# Altium PCB MB1520.PcbDoc (part 1 of 7)
Units mm, origin at the board's own origin, x right, y up, seen from the top; angles counter-clockwise.
Board outline 159 x 88 mm, 6 copper layers (Top Layer, Signal Layer 1, Signal Layer 2, Signal Layer 3, Signal Layer 4, Bottom Layer), stack 1.572 mm thick; 473 components, 377 nets, 1832 pads, 1378 vias.
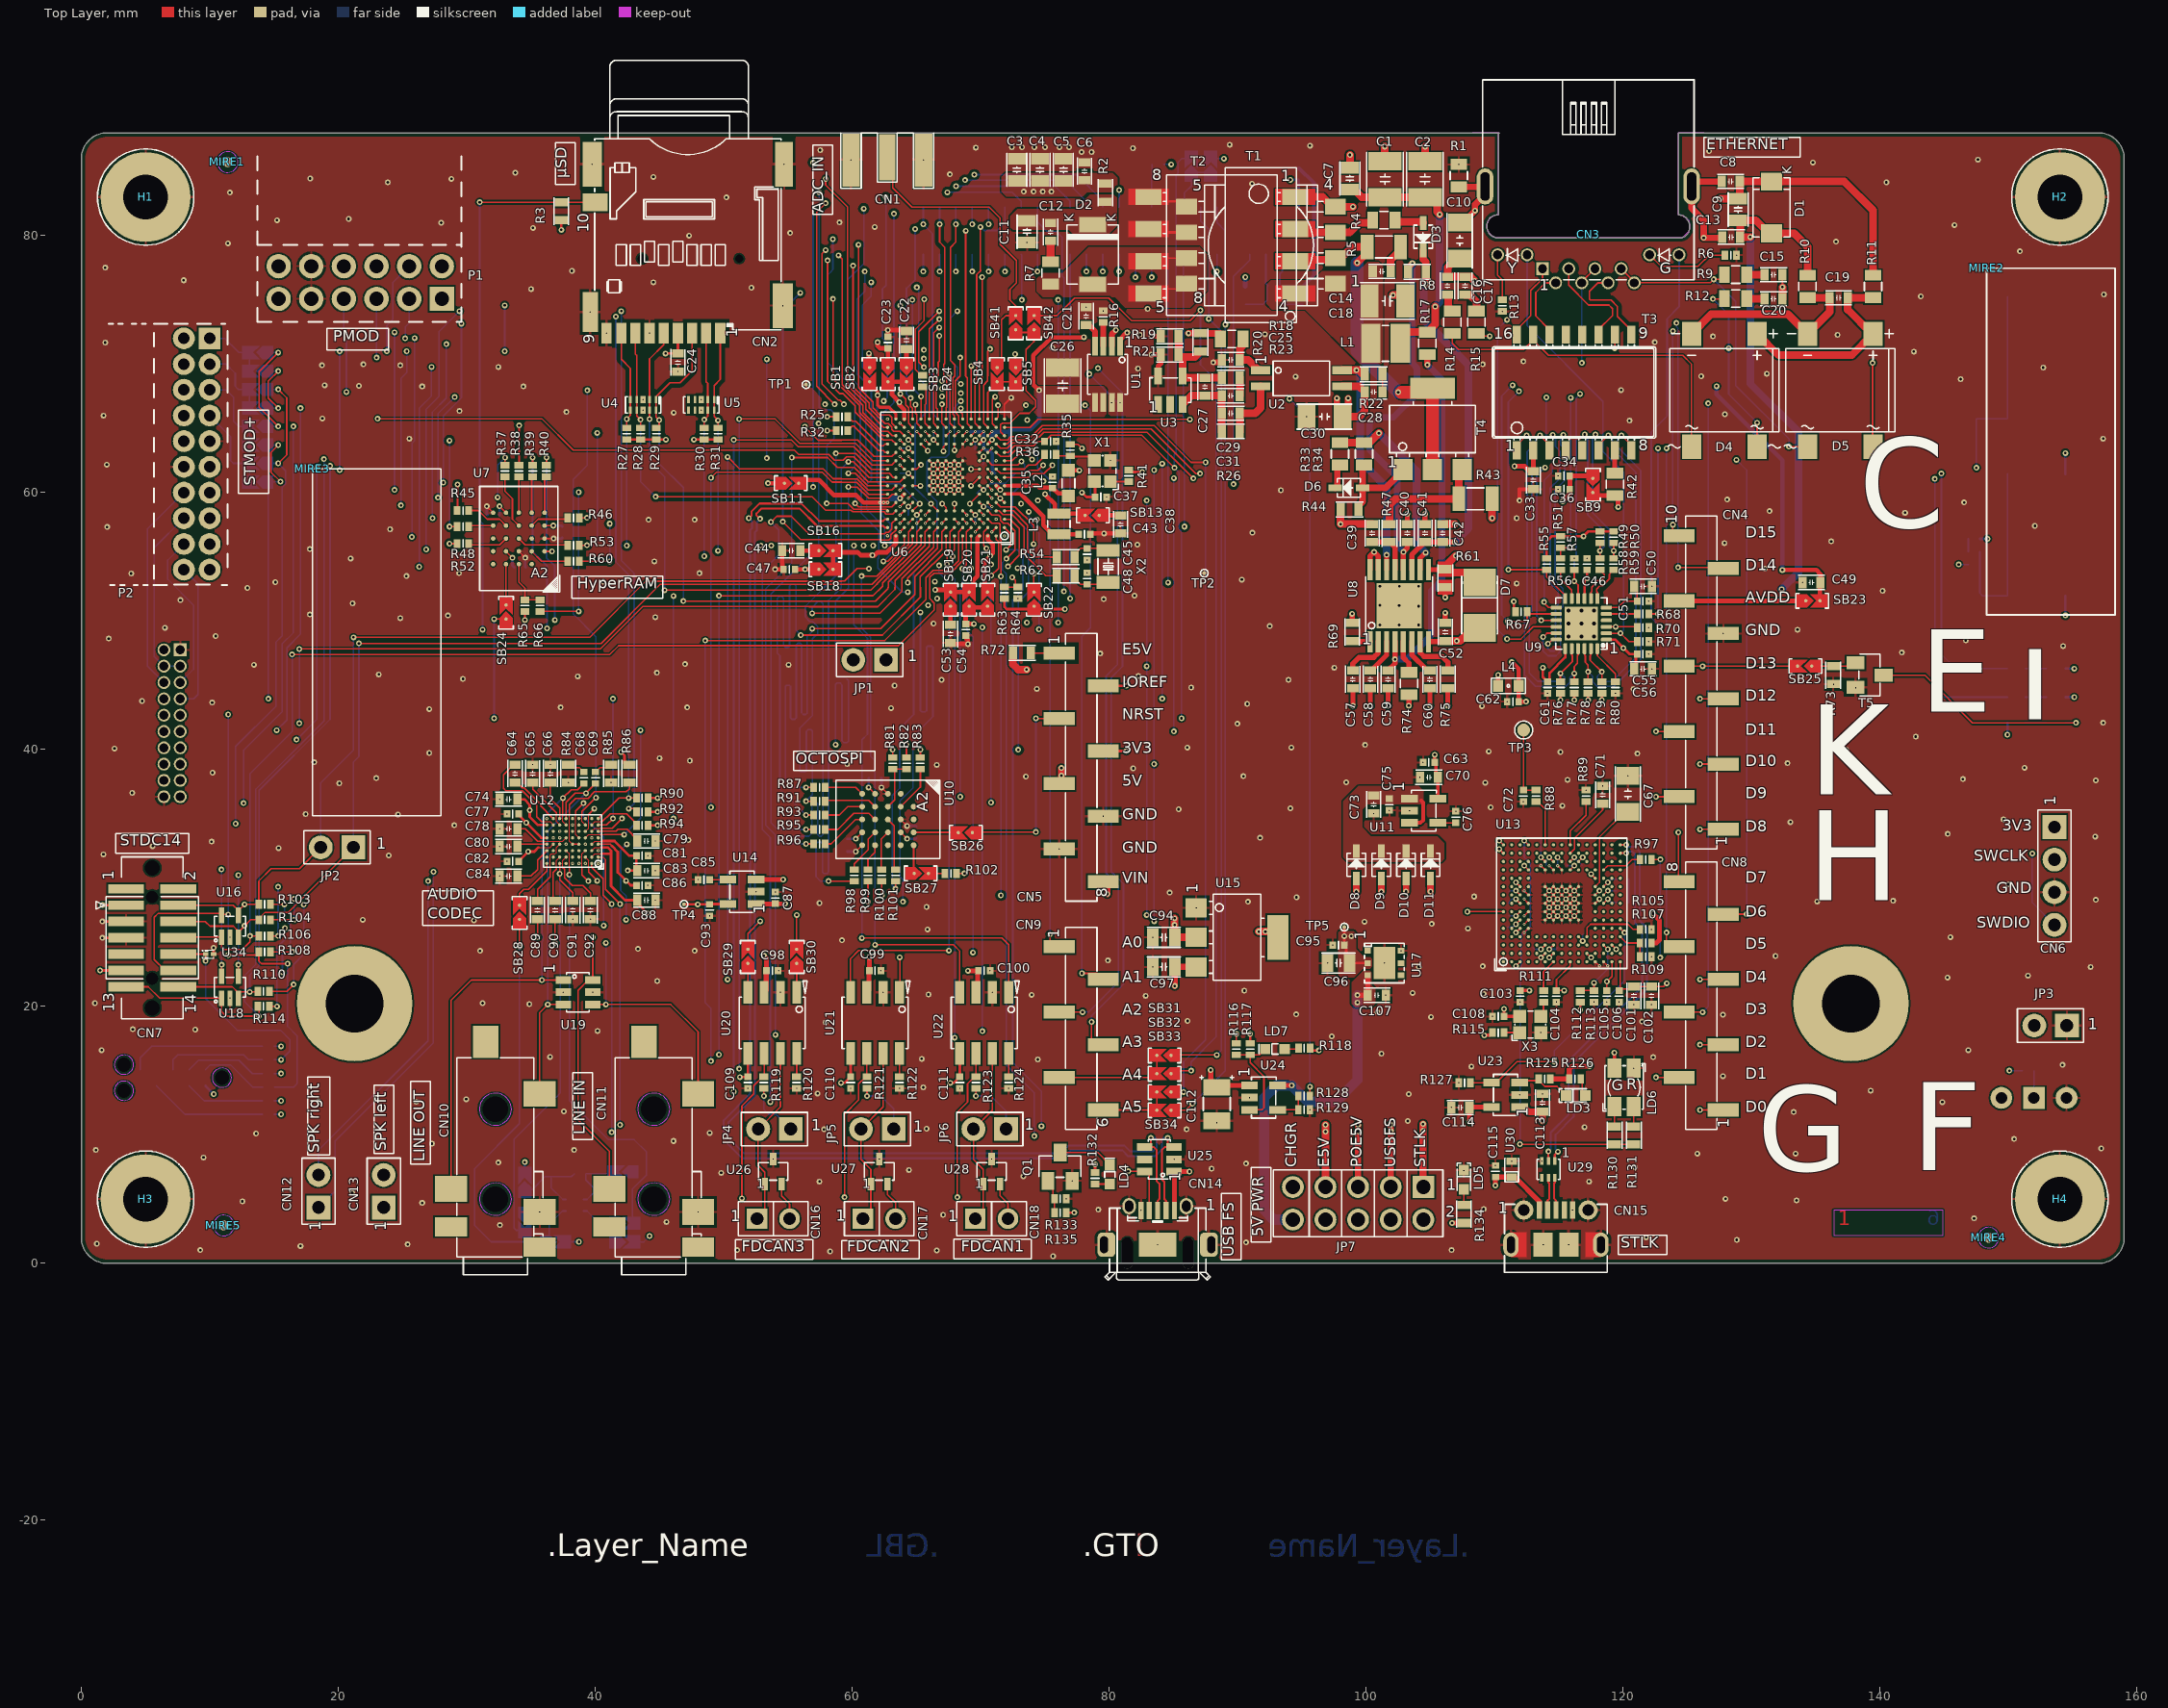
[diagram p0: Top Layer view]
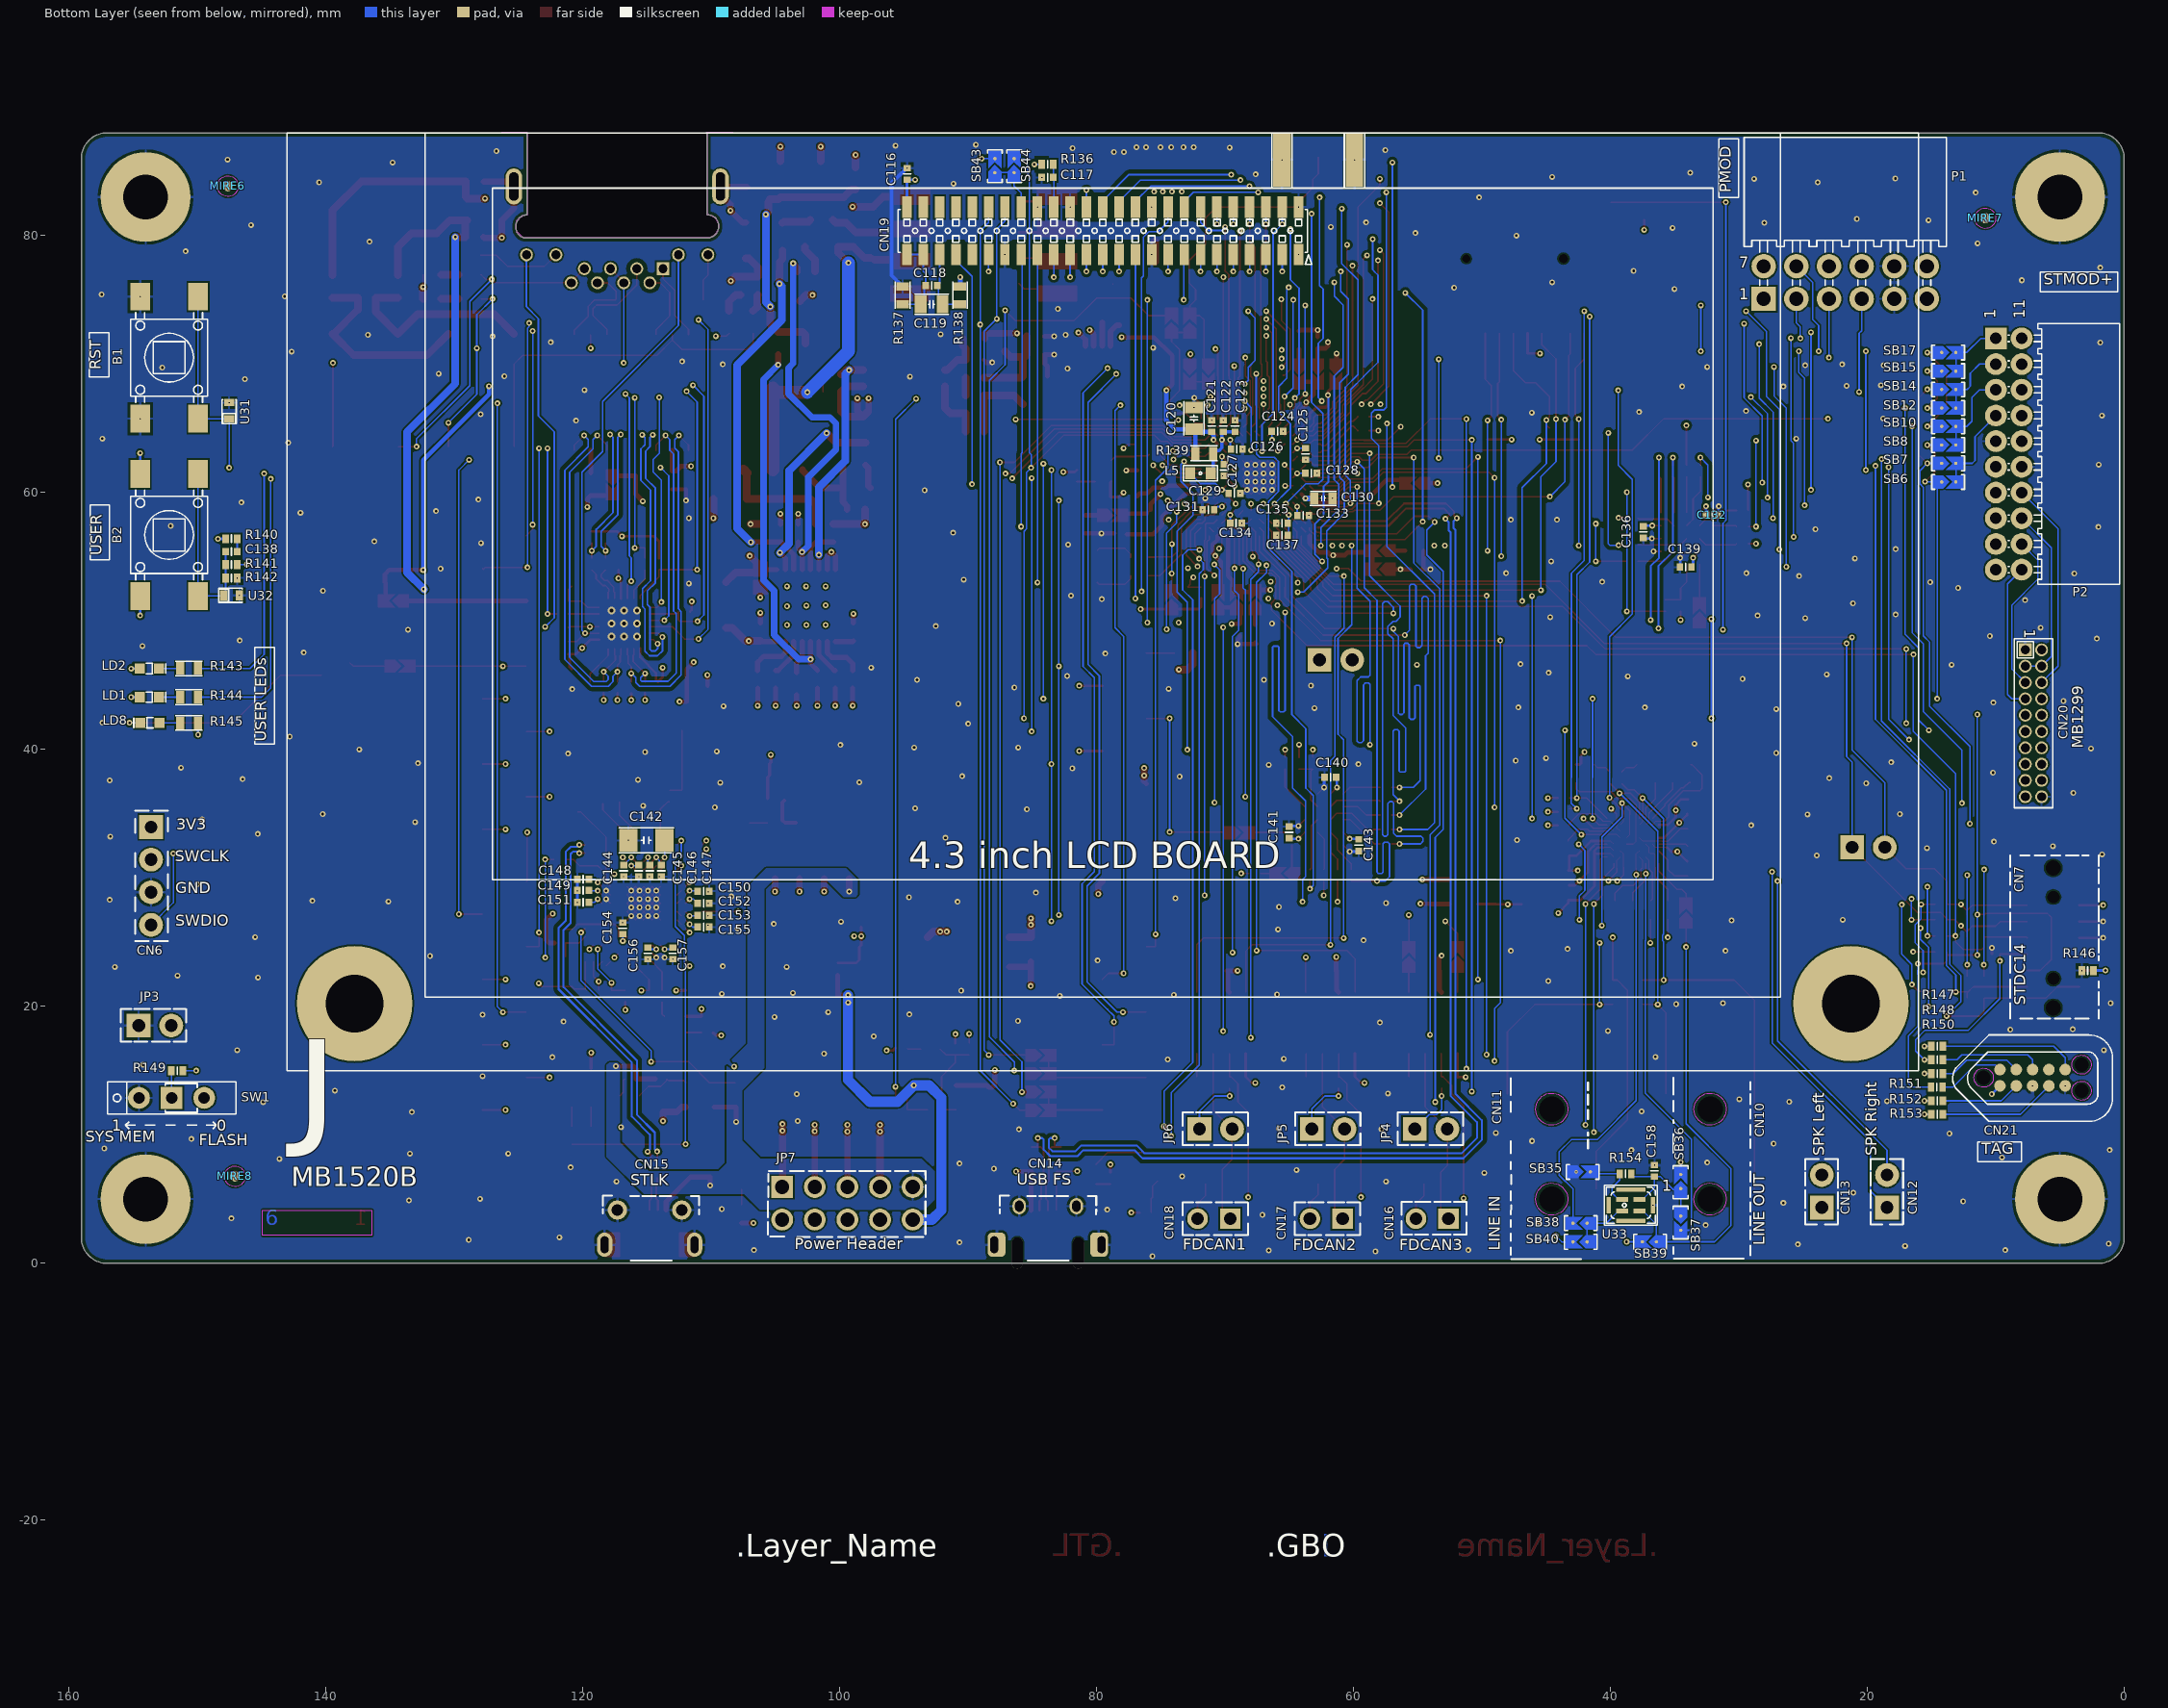
[diagram p1: Bottom Layer view, seen from below]
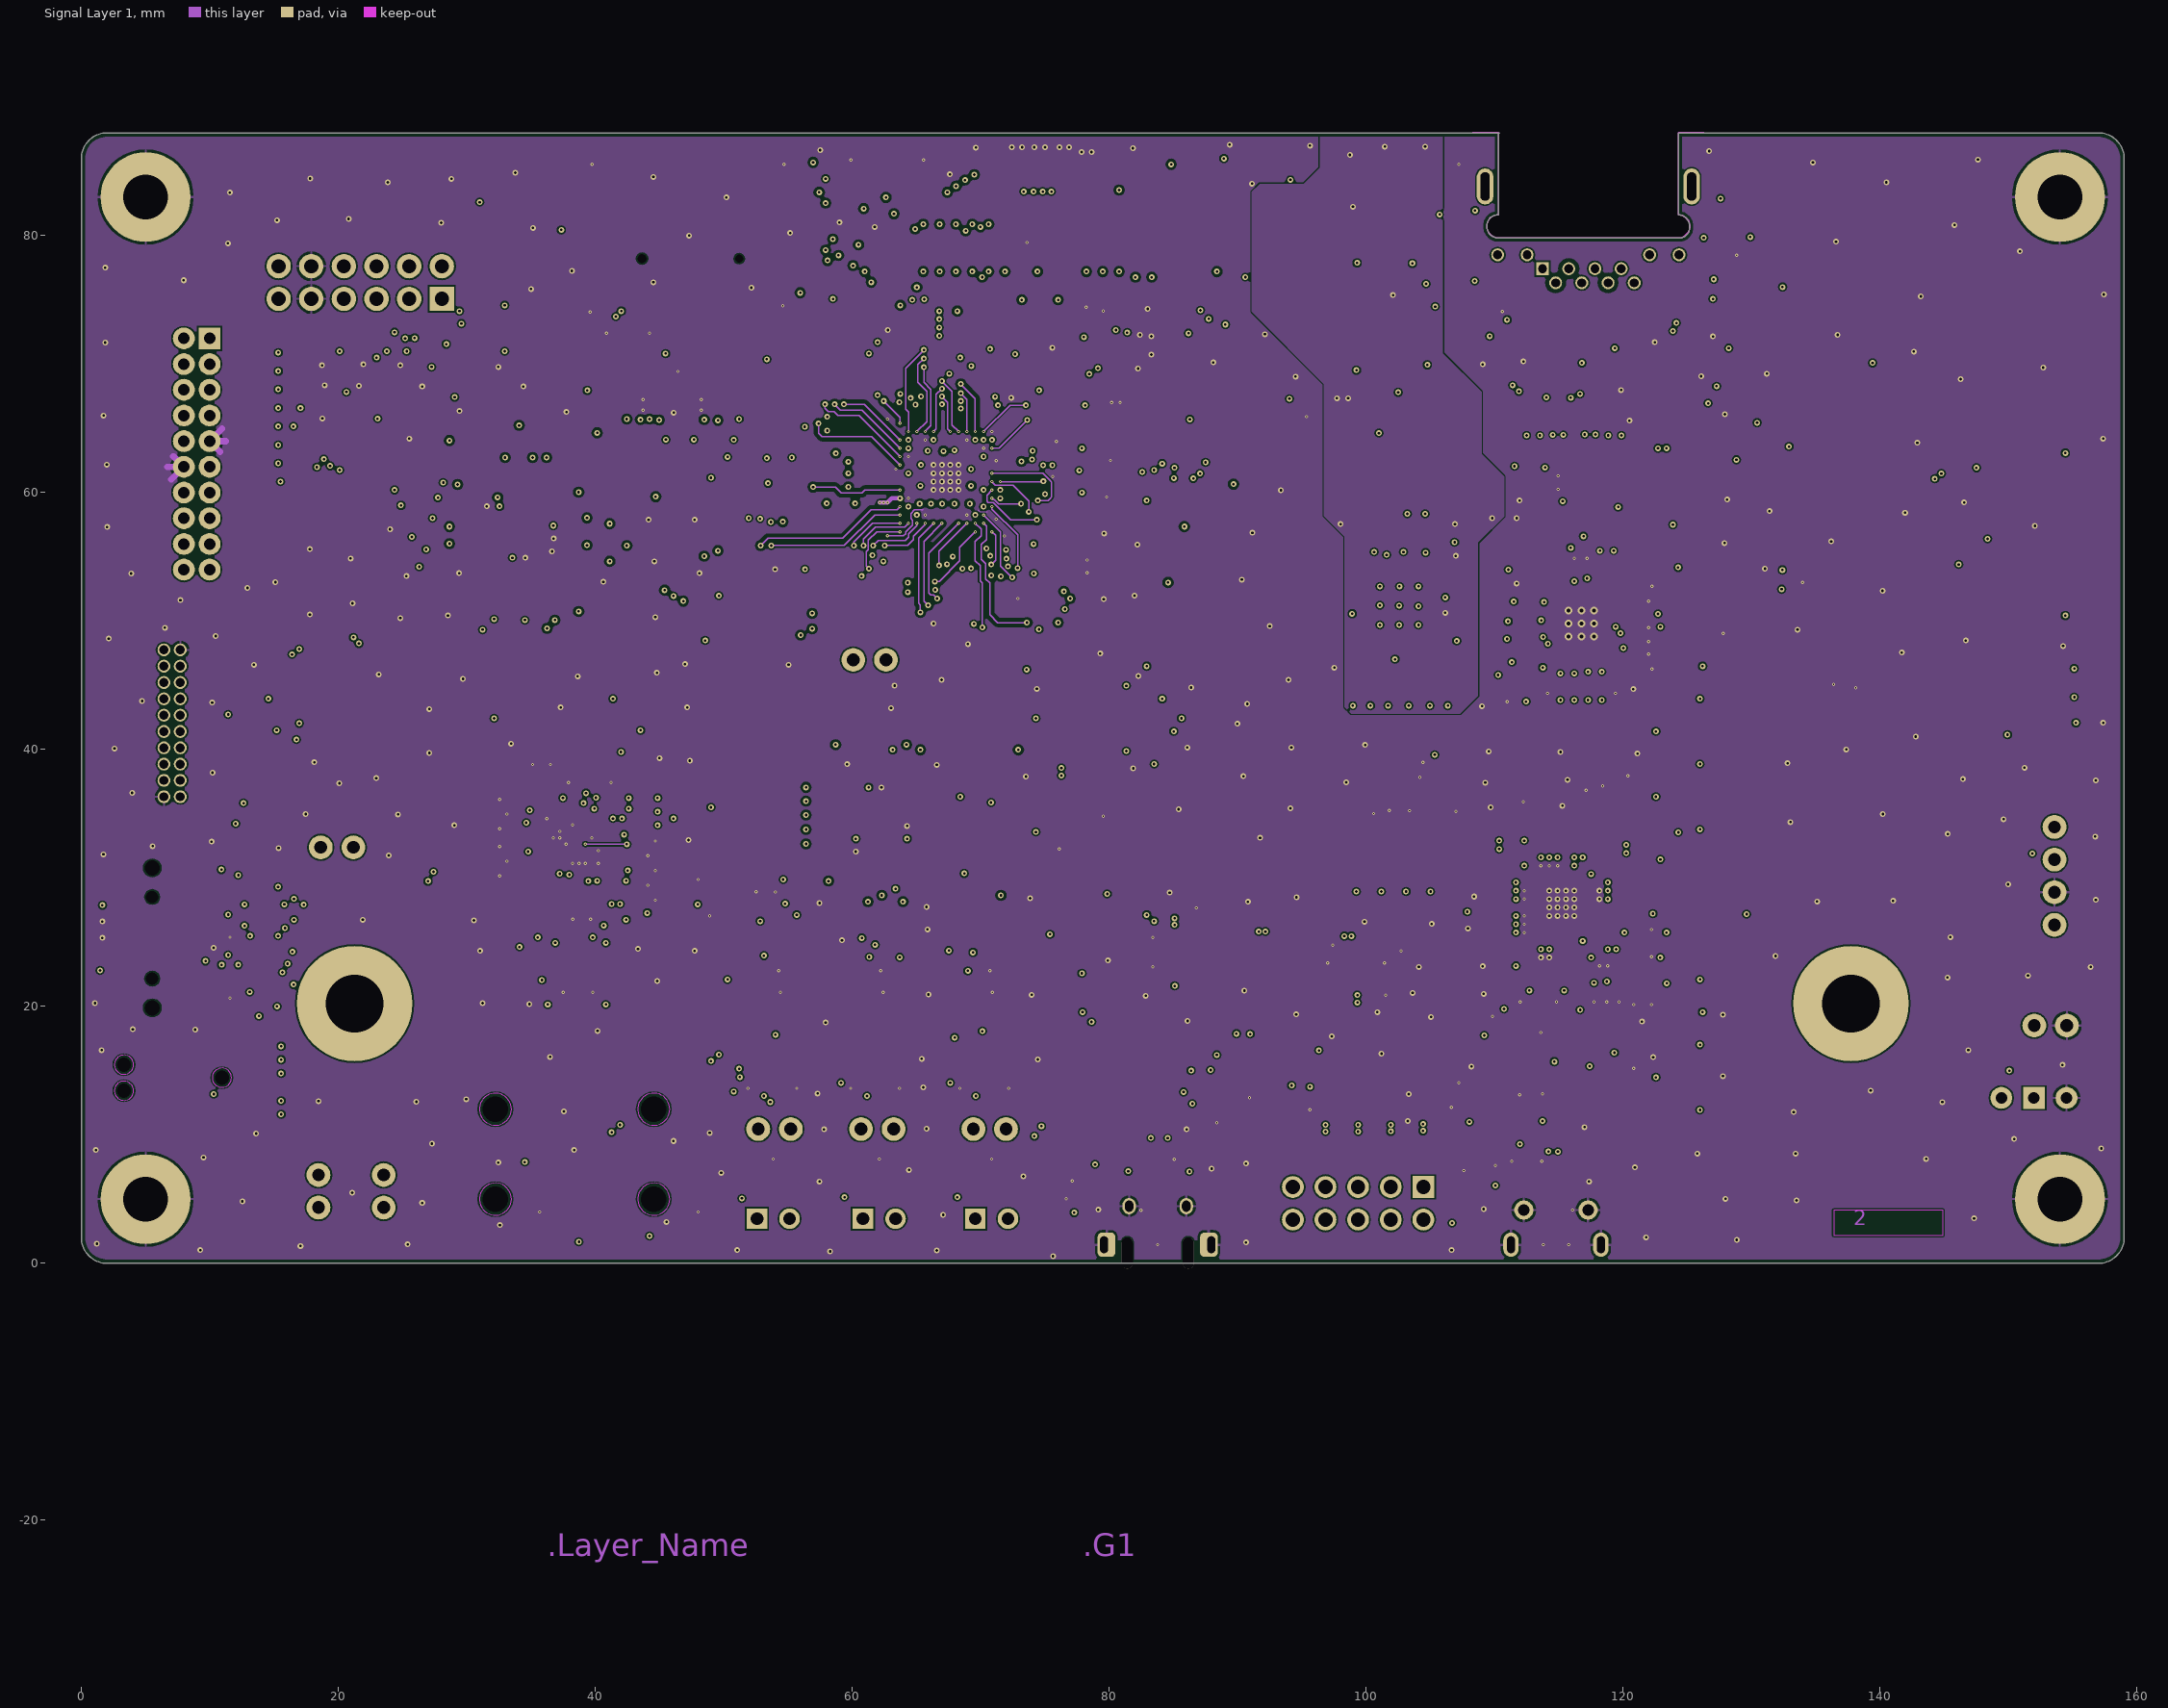
[diagram p2: Signal Layer 1]
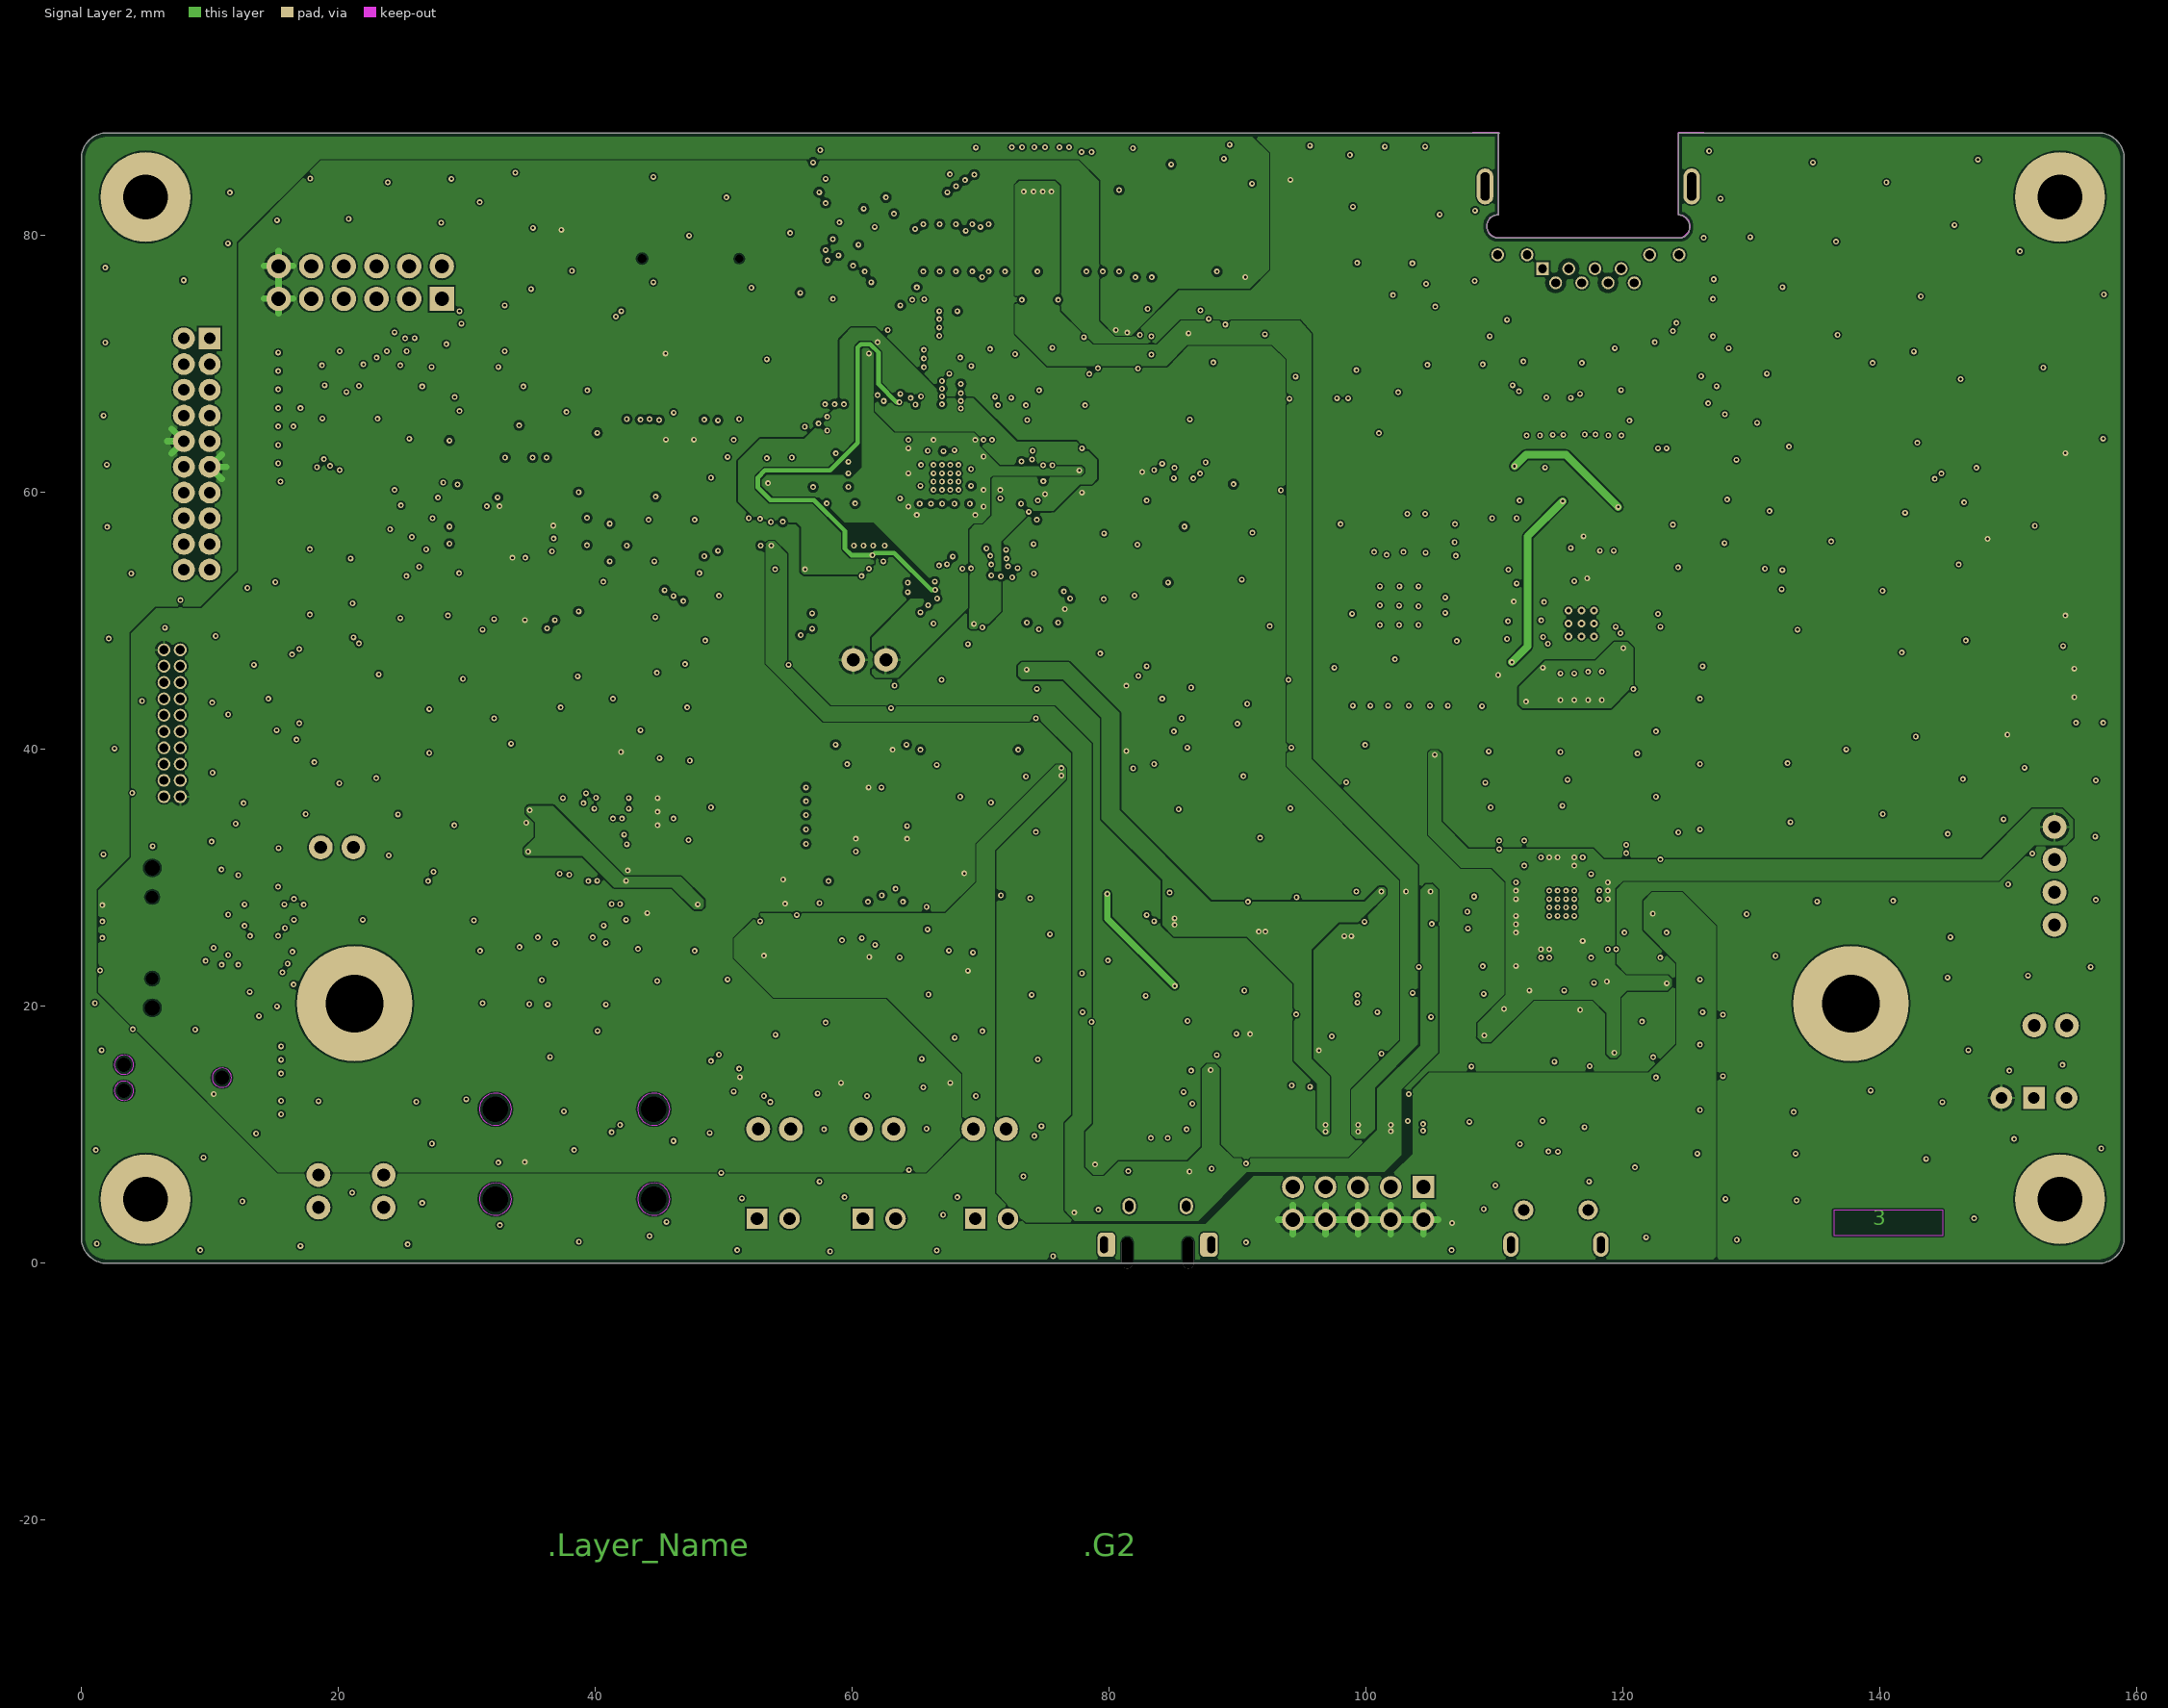
[diagram p3: Signal Layer 2]
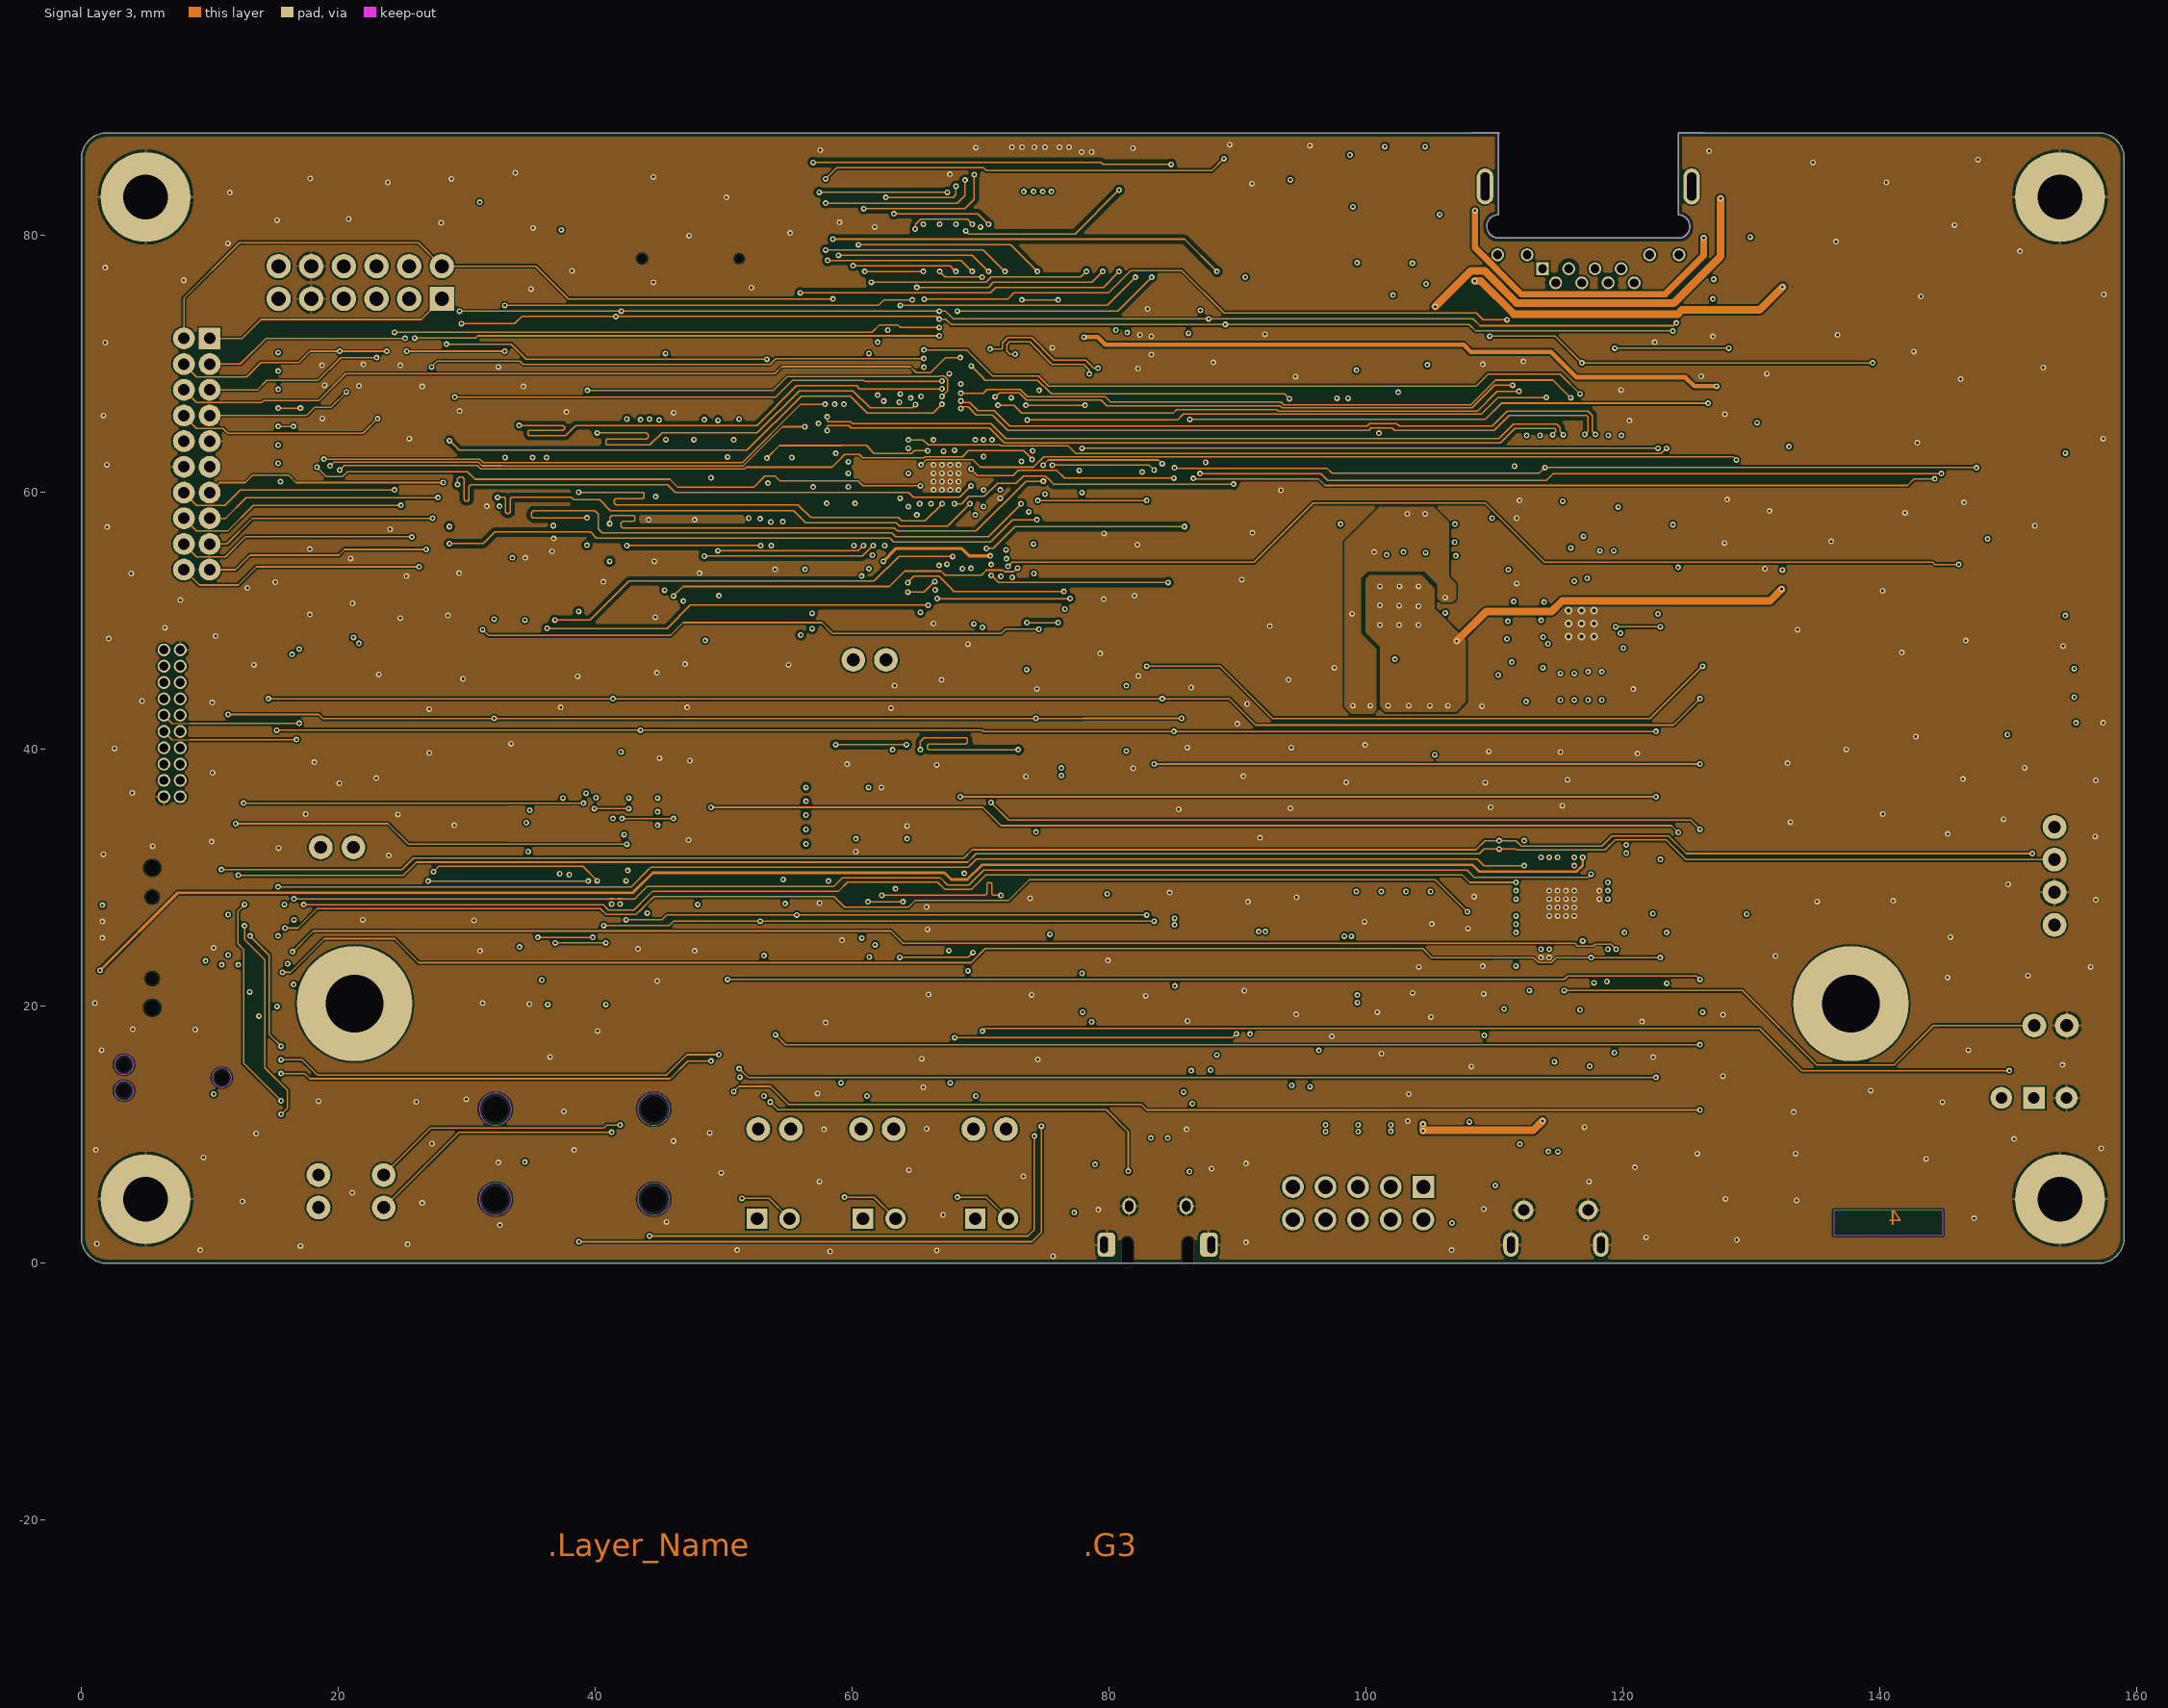
[diagram p4: Signal Layer 3]
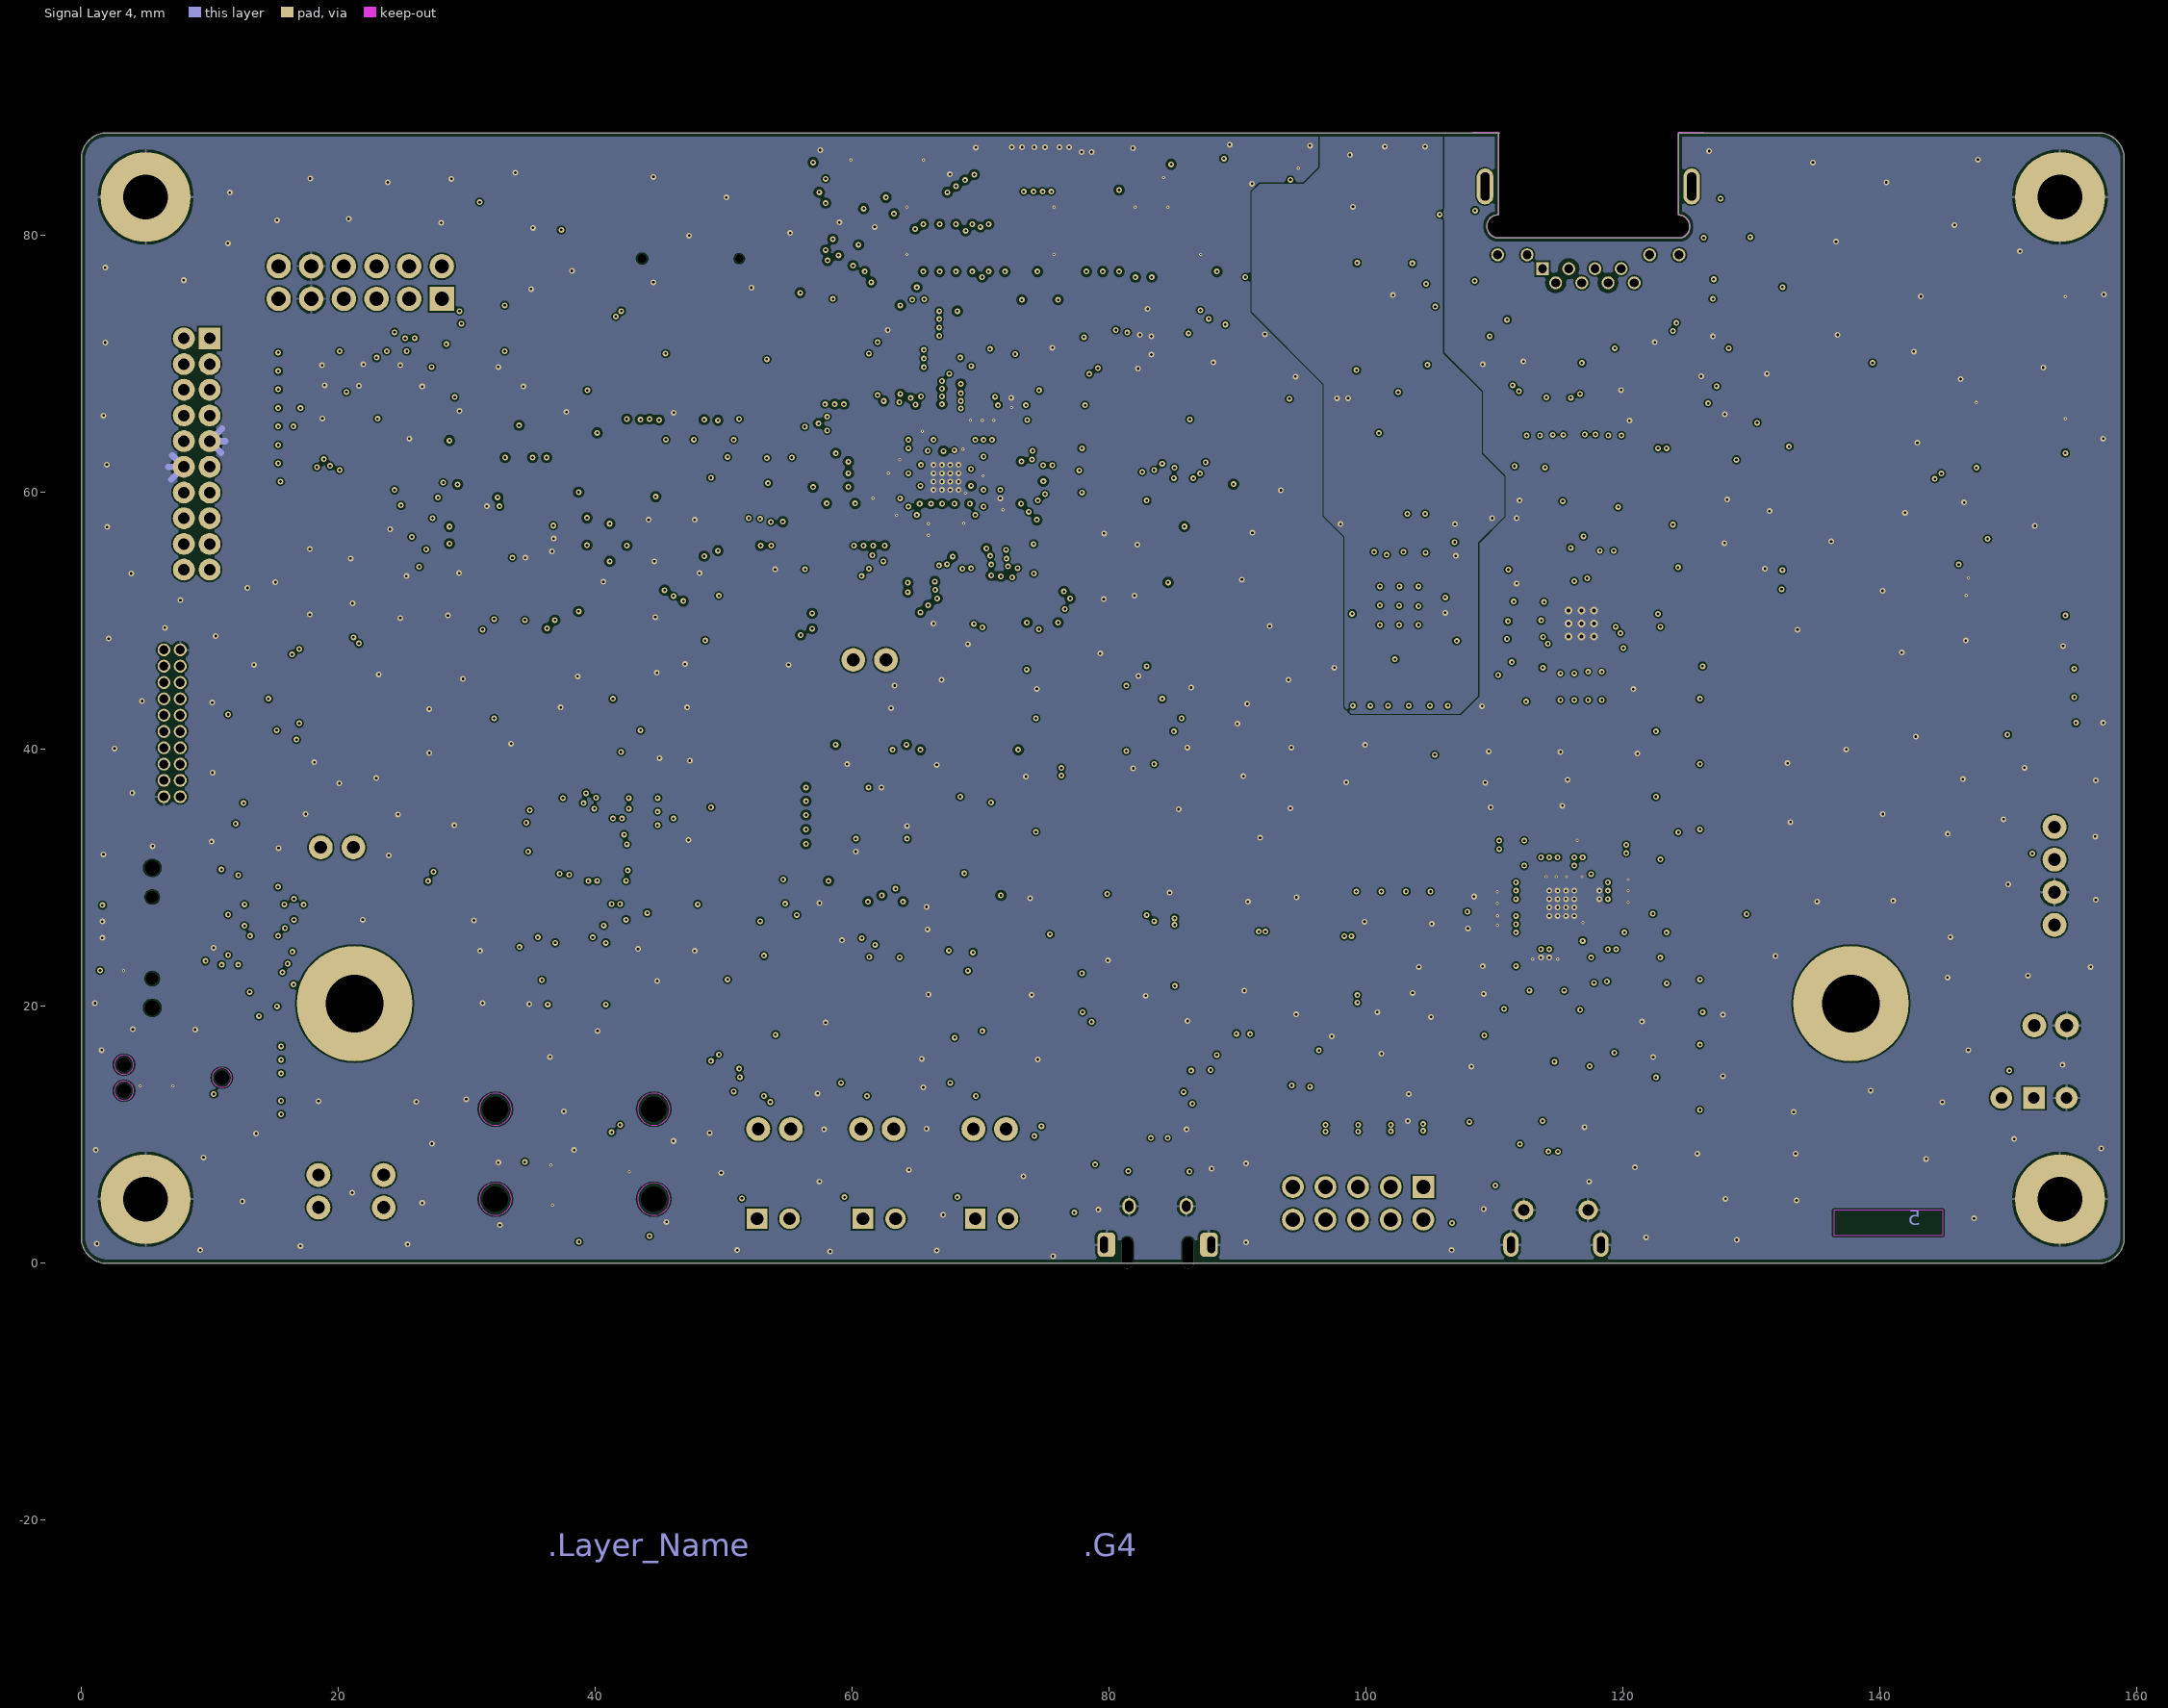
[diagram p5: Signal Layer 4]

## Layer stack, top to bottom
Top Solder: solder mask 0.015, Solder Resist, Dk 3.5
Top Layer: signal copper 0.042
Dielectric1: core 0.099, FR-4, Dk 4.2
Signal Layer 1: signal copper 0.035
Dielectric 2: prepreg 0.102, Dk 4.2
Signal Layer 2: signal copper 0.035
Dielectric 3: core 0.946, FR-4, Dk 4.2
Signal Layer 3: signal copper 0.035
Dielectric 4: prepreg 0.102, Dk 4.2
Signal Layer 4: signal copper 0.035
Dielectric 5: core 0.099, FR-4, Dk 4.2
Bottom Layer: signal copper 0.042
Bottom Solder: solder mask 0.015, Solder Resist, Dk 3.5

## Board outline
0,2 ccw(c2,2) 2,0 157,0 ccw(c157,2) 159,2 159,86 ccw(c157,86) 157,88 124.308,88 124.308,81.61 cw(c124.308,80.742) 125.177,80.742 125.177,80.62 cw(c124.368,80.62) 124.368,79.811 124.303,79.811 110.303,79.811 cw(c110.303,80.71) 109.403,80.71 109.403,80.772 cw(c110.242,80.772) 110.242,81.611 110.303,81.611 110.303,87.936 110.367,88 2,88 ccw(c2,86) 0,86

## Design rules (kind name [scope] priority, off if disabled: settings)
BoardOutlineClearance [All] p1: gap=0.3 ignorepadtopadclearanceinfootprint=FALSE
Clearance Clearance_Diff [InNetClass('Iso_Diff')] p1: gap=0.1 ignorepadtopadclearanceinfootprint=FALSE except(0: Arc-Hole Track-Hole SMDPad-Hole THPad-Hole Via-Hole Fill-Hole Poly-Hole Region-Hole Text-Hole; 0.3: Arc-Fill Arc-Poly Arc-Region Track-Fill Track-Poly Track-Region SMDPad-Fill SMDPad-Poly SMDPad-Region THPad-Fill THPad-Poly THPad-Region Fill-Fill Fill-Poly Fill-Region Poly-Poly Poly-Region Region-Region)
Clearance Clearance_BGA [WithinRoom('RoomDefinition_U6','RoomDefinition_U7','RoomDefinition_U15','RoomDefinition_U16') And TouchesRoom('RoomDefinition_U6','RoomDefinition_U7','RoomDefinition_U15','RoomDefinition_U16') vs OnLayer('Top Layer')] p2: gap=0.1 ignorepadtopadclearanceinfootprint=TRUE except(0: Arc-Hole Track-Hole SMDPad-Hole THPad-Hole Via-Hole Fill-Hole Poly-Hole Region-Hole Text-Hole; 0.08: Track-SMDPad)
Clearance Clearance_300µm [InNetClass('Iso_300µm')] p3: gap=0.12 ignorepadtopadclearanceinfootprint=TRUE except(0: Arc-Hole Track-Hole SMDPad-Hole THPad-Hole Via-Hole Fill-Hole Poly-Hole Region-Hole Text-Hole; 0.2: Via-Fill Via-Poly Via-Region; 0.3: Arc-Arc Arc-Track Arc-Fill Arc-Poly Arc-Region Track-Track Track-Fill Track-Poly Track-Region SMDPad-Fill SMDPad-Poly SMDPad-Region THPad-Fill THPad-Poly THPad-Region Fill-Fill Fill-Poly Fill-Region Poly-Poly Poly-Region Region-Region)
Clearance [All] p4: gap=0.12 ignorepadtopadclearanceinfootprint=FALSE except(0: Arc-Hole Track-Hole SMDPad-Hole THPad-Hole Via-Hole Fill-Hole Poly-Hole Region-Hole Text-Hole)
ComponentClearance [All] p1: gap=0.2 collisioncheckmode=3 verticalgap=0.2 showdistances=FALSE
DiffPairsRouting DiffPairsRouting_100ohms [InDifferentialPairClass('100ohms')] p1: maxlimit=0.254 minlimit=0.227 mostfreqgap=0.254 toplayer_mingap=0.251 toplayer_maxgap=0.251 toplayer_prefgap=0.251 toplayer_minwidth=0.13 toplayer_maxwidth=0.13 toplayer_prefwidth=0.13 midlayer1_mingap=0.254 midlayer1_minwidth=0.381 midlayer1_maxwidth=0.381 midlayer1_prefwidth=0.381 midlayer2_mingap=0.254 midlayer2_minwidth=0.381 midlayer2_maxwidth=0.381 midlayer2_prefwidth=0.381 midlayer3_maxgap=0.227 midlayer3_prefgap=0.227 midlayer3_minwidth=0.104 midlayer3_maxwidth=0.104 midlayer3_prefwidth=0.104 midlayer4_mingap=0.254 midlayer4_minwidth=0.381 midlayer4_maxwidth=0.381 midlayer4_prefwidth=0.381 bottomlayer_mingap=0.251 bottomlayer_maxgap=0.251 bottomlayer_prefgap=0.251 bottomlayer_minwidth=0.13 bottomlayer_maxwidth=0.13 bottomlayer_prefwidth=0.13 maxuncoupledlength=12.7
DiffPairsRouting DiffPairsRouting_90ohms [InDifferentialPairClass('90ohms')] p2: maxlimit=0.254 minlimit=0.226 mostfreqgap=0.254 toplayer_maxgap=0.226 toplayer_prefgap=0.226 toplayer_minwidth=0.155 toplayer_maxwidth=0.155 toplayer_prefwidth=0.155 midlayer1_mingap=0.254 midlayer1_minwidth=0.381 midlayer1_maxwidth=0.381 midlayer1_prefwidth=0.381 midlayer2_mingap=0.254 midlayer2_minwidth=0.381 midlayer2_maxwidth=0.381 midlayer2_prefwidth=0.381 midlayer3_mingap=0.251 midlayer3_maxgap=0.251 midlayer3_prefgap=0.251 midlayer3_minwidth=0.13 midlayer3_maxwidth=0.13 midlayer3_prefwidth=0.13 midlayer4_mingap=0.254 midlayer4_minwidth=0.381 midlayer4_maxwidth=0.381 midlayer4_prefwidth=0.381 bottomlayer_maxgap=0.226 bottomlayer_prefgap=0.226 bottomlayer_minwidth=0.155 bottomlayer_maxwidth=0.155 bottomlayer_prefwidth=0.155 maxuncoupledlength=12.7
HoleSize [All] p1: absolutevalues=TRUE maxlimit=10 minlimit=0.025 maxpercent=80.000 minpercent=20.000
MatchedLengths MatchedLengths_OctoSPI [InNetClass('OctoSPI')] p1: tolerance=7 checknetsindiffpair=FALSE checkdiffpairvsdiffpair=TRUE checkxsignals=TRUE checkothers=TRUE
MatchedLengths MatchedLengths_HyperRAM [InNetClass('HyperRAM')] p2: tolerance=7 checknetsindiffpair=FALSE checkdiffpairvsdiffpair=TRUE checkxsignals=TRUE checkothers=TRUE
MaxMinImpedance "Schematic Impedance Constraint_3" [InNet('USB_DEV_HS_P')] p1: minimum=85,00 maximum=95,00
MaxMinImpedance "Schematic Impedance Constraint_2" [InNet('USB_DEV_HS_CN_P')] p2: minimum=85,00 maximum=95,00
MaxMinImpedance "Schematic Impedance Constraint_1" [InNet('USB_DEV_HS_N')] p3: minimum=85,00 maximum=95,00
MaxMinImpedance "Schematic Impedance Constraint" [InNet('USB_DEV_HS_CN_N')] p4: minimum=85,00 maximum=95,00
MinimumSolderMaskSliver [All] p1: minsoldermaskwidth=0.013
PlaneClearance [All] p1: clearance=0.3
PlaneConnect [All] p1: planeconnectstyle=Relief reliefexpansion=0.508 reliefentries=4 reliefconductorwidth=0.254 reliefairgap=0.152
PolygonConnect PolygonConnect_NO_TH [IsNamedPolygon('NO_TH')] p1: connectstyle=Direct reliefconductorwidth=0.254 reliefentries=4 polygonreliefangle="90 Angle" airgapwidth=0.254
PolygonConnect [All] p2: thpad.connectstyle=Relief thpad.reliefconductorwidth=0.2 thpad.reliefentries=4 thpad.polygonreliefangle="90 Angle" thpad.airgapwidth=0.2 smdpad.connectstyle=Relief smdpad.reliefconductorwidth=0.2 smdpad.reliefentries=4 smdpad.polygonreliefangle="90 Angle" smdpad.airgapwidth=0.2 via.connectstyle=Direct via.reliefconductorwidth=0.508 via.reliefentries=4 via.polygonreliefangle="90 Angle" via.airgapwidth=0.152
RoomDefinition RoomDefinition_U16 [InComponentClass('Room Definition 1')] p1: confinementstyle=ConfineIn formatcopy=TRUE lockcomponents=FALSE outline 109.908,22.702 109.908,33.352 120.558,33.352 120.558,22.702
RoomDefinition RoomDefinition_U15 [InComponentClass('Room Definition 1')] p2: confinementstyle=ConfineIn formatcopy=TRUE lockcomponents=FALSE outline 44.1,27.5 33.2,27.5 33.2,37.8 44.1,37.8
RoomDefinition RoomDefinition_U7 [InComponentClass('Room Definition 1')] p3: confinementstyle=ConfineIn formatcopy=TRUE lockcomponents=FALSE outline 29.7,50.825 29.7,61.725 38.325,61.725 38.325,50.825
RoomDefinition RoomDefinition_U6 [InComponentClass('Room Definition 1')] p4: confinementstyle=ConfineIn formatcopy=TRUE lockcomponents=FALSE outline 59.175,52.625 59.175,69.075 75.425,69.075 75.425,52.625
RoutingVias [All] p1: holewidth=0.2 width=0.45 viastyle="Through Hole" minholewidth=0.1 minwidth=0.25 maxholewidth=0.2 maxwidth=0.45
SilkToSilkClearance STM32_LOGO [(ObjectKind = 'Text') And (Component = 'HW10')] p1: silktosilkclearance=0
SilkToSilkClearance LOGO [(ObjectKind = 'Text') And (Component = 'HW2')] p2: silktosilkclearance=0
SilkToSilkClearance [All] p3: silktosilkclearance=0.102
SilkToSolderMaskClearance [IsPad] p1: minsilkscreentomaskgap=0.008 clearancetoexposedcopper=TRUE
SolderMaskExpansion [All] p1: expansion=0.102
Width Width_Alim [InNetClass('Alim')] p1: maxlimit=2 minlimit=0.1 preferedwidth=0.2
Width Width_BGA [WithinRoom('RoomDefinition_U6','RoomDefinition_U7','RoomDefinition_U15','RoomDefinition_U16') and TouchesRoom('RoomDefinition_U6','RoomDefinition_U7','RoomDefinition_U15','RoomDefinition_U16')] p2: maxlimit=1 minlimit=0.09 preferedwidth=0.1 minimp=50.000000 maximp=50.000000 favimp=50.000000
Width Width_55Ohms [InNetClass('55 Ohms')] p3: maxlimit=0.254 minlimit=0.1 preferedwidth=0.254 toplayer_minwidth=0.127 toplayer_maxwidth=0.127 toplayer_prefwidth=0.127 midlayer3_minwidth=0.102 midlayer3_maxwidth=0.102 midlayer3_prefwidth=0.102 bottomlayer_minwidth=0.127 bottomlayer_maxwidth=0.127 bottomlayer_prefwidth=0.127 minimp=50.000000 maximp=50.000000 favimp=50.000000
Width [All] p4: maxlimit=1 minlimit=0.12 preferedwidth=0.12 minimp=50.000000 maximp=50.000000 favimp=50.000000
22 further rules are at their usual default settings.

## Classes and differential pairs
net class OctoSPI: NetR24_2 NetR82_1 NetR83_2 NetR87_1 NetR91_1 NetR93_1 NetR95_1 NetR96_1 NetR98_1 NetR99_1 NetR100_2
net class Iso_300µm: CTP_INT LCD_B0 LCD_B1 LCD_B2 LCD_B3 LCD_B4 LCD_B5 LCD_B6 LCD_B7 LCD_BL_CTRL LCD_CLK LCD_DE LCD_DISP LCD_G0 LCD_G1 LCD_G2 LCD_G3 LCD_G4 LCD_G5 LCD_G6 LCD_G7 LCD_HSYNC LCD_R0 LCD_R1 LCD_R2 LCD_R3 LCD_R4 LCD_R5 LCD_R6 LCD_R7 LCD_VSYNC NetR24_2 NetR37_2 NetR38_1 NetR39_1 NetR40_1 NetR45_2 NetR46_2 NetR48_1 NetR52_2 NetR53_2 NetR60_2 NetR66_1 NetR82_1 NetR83_2 NetR87_1 NetR91_1 NetR93_1 NetR95_1 NetR96_1 NetR98_1 NetR99_1 NetR100_2 OCSPI1_CLK OCSPI1_DQS OCSPI1_IO0 OCSPI1_IO1 OCSPI1_IO2 OCSPI1_IO3 OCSPI1_IO4 OCSPI1_IO5 OCSPI1_IO6 OCSPI1_IO7 OCSPI1_NCS OCSPI2_CLK OCSPI2_DQS OCSPI2_IO0 OCSPI2_IO1 OCSPI2_IO2 OCSPI2_IO3 OCSPI2_IO4 OCSPI2_IO5 OCSPI2_IO6 OCSPI2_IO7 OCSPI2_NCS SDIO1_CK SDIO1_CMD SDIO1_D0 SDIO1_D1 SDIO1_D2 SDIO1_D3
differential pair class 100ohms: ARD_A RD RD_CN RMII_RXD RMII_RXD_R RMII_TXD RMII_TXD_R TD TD_CN
differential pair class 90ohms: USB_DEV_HS USB_DEV_HS_CN USB_FS
net class LCD: CTP_INT LCD_B0 LCD_B1 LCD_B2 LCD_B3 LCD_B4 LCD_B5 LCD_B6 LCD_B7 LCD_BL_CTRL LCD_CLK LCD_DE LCD_DISP LCD_G0 LCD_G1 LCD_G2 LCD_G3 LCD_G4 LCD_G5 LCD_G6 LCD_G7 LCD_HSYNC LCD_R0 LCD_R1 LCD_R2 LCD_R3 LCD_R4 LCD_R5 LCD_R6 LCD_R7 LCD_VSYNC
net class HyperRAM_R: OCSPI2_CLK OCSPI2_DQS OCSPI2_IO0 OCSPI2_IO1 OCSPI2_IO2 OCSPI2_IO3 OCSPI2_IO4 OCSPI2_IO5 OCSPI2_IO6 OCSPI2_IO7 OCSPI2_NCS
net class OctoSPI_R: OCSPI1_CLK OCSPI1_DQS OCSPI1_IO0 OCSPI1_IO1 OCSPI1_IO2 OCSPI1_IO3 OCSPI1_IO4 OCSPI1_IO5 OCSPI1_IO6 OCSPI1_IO7 OCSPI1_NCS
net class SD_CARD: SDIO1_CK SDIO1_CMD SDIO1_D0 SDIO1_D1 SDIO1_D2 SDIO1_D3
net class "55 Ohms": ADC_IN LCD_B0 LCD_B1 LCD_B2 LCD_B3 LCD_B4 LCD_B5 LCD_B6 LCD_B7 LCD_CLK LCD_DE LCD_G0 LCD_G1 LCD_G2 LCD_G3 LCD_G4 LCD_G5 LCD_G6 LCD_G7 LCD_HSYNC LCD_R0 LCD_R1 LCD_R2 LCD_R3 LCD_R4 LCD_R5 LCD_R6 LCD_R7 LCD_VSYNC NetR24_2 NetR35_2 NetR36_2 NetR37_2 NetR38_1 NetR39_1 NetR40_1 NetR45_2 NetR46_2 NetR48_1 NetR52_2 NetR53_2 NetR60_2 NetR66_1 NetR82_1 NetR83_2 NetR87_1 NetR91_1 NetR93_1 NetR95_1 NetR96_1 NetR98_1 NetR99_1 NetR100_2 OCSPI1_CLK OCSPI1_DQS OCSPI1_IO0 OCSPI1_IO1 OCSPI1_IO2 OCSPI1_IO3 OCSPI1_IO4 OCSPI1_IO5 OCSPI1_IO6 OCSPI1_IO7 OCSPI1_NCS OCSPI2_CLK OCSPI2_DQS OCSPI2_IO0 OCSPI2_IO1 OCSPI2_IO2 OCSPI2_IO3 OCSPI2_IO4 OCSPI2_IO5 OCSPI2_IO6 OCSPI2_IO7 OCSPI2_NCS OSC_25M RMII_REF_CLK SDIO1_CK SDIO1_CMD SDIO1_D0 SDIO1_D1 SDIO1_D2 SDIO1_D3
component class "Components Class 1": C52 C73 C119 C120 C121 C122 C123 C127 C128 C129 C131 C133 C134 C151 L4 R139 U6
component class "U_SD CARD": C52 CN2 R3 R14 R27 R29 R30 R31 U4 U5
component class U_LCD: C97 C119 C151 C155 CN19 HW2 R136 R137 R138
component class Audio: C24 C46 C48 C52 C53 C55 C57 C64 C65 C66 C68 C79 C81 C82 C84 C91 C92 C128 C132 C137 C151 CN15 CN17 CN18 CN21 R67 R71 R84 R85 R86 R90 R154 SB30 SB31 SB34 SB37 SB38 SB39 SB40 U12 U19 U33
component class Arduino: C52 CN5 CN8 CN17 LD8 R72 R73 R103 SB25 SB27 SB31 SB32 SB33 SB34 T5
component class U_Ethernet: C40 C52 C57 C58 C62 C142 L4 R6 R11 R41 R46 R49 R51 R55 R56 R57 R58 R59 R67 R68 R70 R71 R77 R78 R79 R80 U300
component class U_OCSPI: C140 C142 C144 R82 R102 SB26 SB27 U10
component class FDCANs: C65 C98 C99 C109 C111 C131 CN15 CN17 CN21 JP4 JP5 JP6 R68 R70 R120 R121 R123 R124 U17 U21 U22 U26 U28 U30
component class HW_Mechanical_Parts: H1 H2 H3 H4 HW6 HW8
component class PoE: C1 C2 C3 C4 C5 C6 C7 C8 C9 C10 C11 C12 C13 C14 C16 C17 C19 C20 C25 C26 C28 C29 C30 C31 C32 C40 C52 C55 C57 C60 C61 C62 C98 C109 C123 C127 D1 D2 D3 D4 D5 D6 D7 L1 R1 R2 R4 R5 R6 R8 R10 R11 R12 R14 R15 R17 R18 R20 R21 R26 R27 R28 R33 R34 R40 R44 R54 R61 R67 R69 R74 R80 R82 R139 T2 T3 T4 U3 U8 U10
component class Power: C16 C18 C22 C25 C29 C37 C44 C46 C51 C52 C57 C58 C73 C85 C87 C93 C94 C95 C96 C97 C107 C119 C120 C121 C122 C123 C127 C128 C129 C130 C131 C133 C134 C137 C151 C184 C300 C301 HW14 JP1 L2 L3 L4 R16 R139 R306 SB3 SB8 SB13 SB15 SB17 SB18 SB19 SB20 SB22 SB23 SB25 TP1 TP4 TP5 U1 U12 U17 U26 U300
component class U_HyperRAM: C136 C140 R65 R300 SB22 U7
component class STlink_V3E_PWR: C22 C37 C46 C67 C73 C81 C92 C94 C97 C101 C102 C103 C105 C106 C113 C114 C119 C122 C132 C142 C144 C145 C146 C147 C148 C149 C151 C155 D8 D9 D10 D11 D13 JP7 LD3 LD4 R55 R105 R125 R126 R127 U24 U26
component class STMod+: B2 C82 CN19 LD1 LD2 P1 P2 R140 R141 R142 R144 R149 SB6 SB8 SB10 SB11 SB12 SB13 SB19 SB30 U31
component class TAG: R147 R148 R150 R151 R152 R153
component class STlink_V3E_Module: C67 C71 C72 C104 C115 CN7 CN8 CN15 JP2 JP3 LD2 R17 R25 R54 R56 R60 R88 R89 R103 R106 R107 R108 R109 R110 R111 R112 R113 R130 R146 R300 R301 R302 R303 R304 R305 TP4 U4 U16 U26 U29 U30 X3
component class U_MCU: B2 C87 C121 C122 C142 CN3 HW12 HW13 R17 R21 R24 R25 R35 R37 R38 R39 R40 R41 R44 R45 R46 R48 R53 R54 R60 R61 R62 R63 R64 R77 R80 R82 R83 R93 R95 R98 R100 R101 R136 R139 R149 R302 R303 R304 SB5 SB22 SB29 SB30 SW1 U6 U31 X1 X2
component class USB_OTG_FS: C112 CN15 LD1 LD4 Q1 R74 R116 R117 R118 R128 R132 R133 R135 U24 U25
component class "Components Class 2": C136 C140
net class HyperRAM: NetR38_1 NetR39_1 NetR40_1 NetR45_2 NetR46_2 NetR48_1 NetR52_2 NetR53_2 NetR60_2 NetR66_1 NetR83_2
net class Iso_Diff: NetCN3_2 NetCN3_3 NetCN3_6 NetCN5_1 NetR25_2 NetR32_2 NetR58_2 NetR59_2 RD_N RD_P RMII_RXD0 RMII_RXD1 RMII_TXD0 RMII_TXD1 TD_N TD_P USB_DEV_HS_CN_N USB_DEV_HS_CN_P USB_DEV_HS_N USB_DEV_HS_P USB_FS_DM USB_FS_DP
net class Alim: 1V8 3V3 3V3_STLK 5V 5V_POE 5V_USB_CHGR 5V_USB_STLK AGND Chassis E5V GNDDetect POE7 USB_FS_VBUS VDD_ETH VDD_MCU VDD_SDC VDDA VIN VREF+
differential pair ARD_A: +ARD_A2 -ARD_A3
differential pair RMII_TXD_R: +NetR25_2 -NetR32_2
differential pair RD_CN: +NetCN3_3 -NetCN3_6
differential pair TD_CN: +NetCN3_1 -NetCN3_2
differential pair RMII_RXD_R: +NetR58_2 -NetR59_2
differential pair RMII_RXD: +RMII_RXD0 -RMII_RXD1
differential pair RMII_TXD: +RMII_TXD0 -RMII_TXD1
differential pair TD: +TD_P -TD_N
differential pair RD: +RD_P -RD_N
differential pair USB_DEV_HS: +USB_DEV_HS_P -USB_DEV_HS_N
differential pair USB_DEV_HS_CN: +USB_DEV_HS_CN_P -USB_DEV_HS_CN_N
differential pair USB_FS: +USB_FS_DP -USB_FS_DM

## Components (designator, comment, footprint, x,y, rotation, side; value= is the part's Value field where it differs from the comment)
B1 "SW-PUSH-CMS" SWI_WEALTHMETAL_TD-0341_4P_BLACK 152.175,70.5 r180 bottom value=SWITCH
B2 "SW-PUSH-CMS" SWI_WEALTHMETAL_TD-0341_4P_BLUE 152.175,56.7 r180 bottom value=SWITCH
C1 "Capacitor" C1210 101.461,84.389 r270 top value="4.7uF, 100V"
C2 "Capacitor" C1210 104.586,84.389 r270 top value="4.7uF, 100V"
C3 "Capacitor" C0805 72.811,85.114 r270 top value=47uF
C4 "Capacitor" C0805 74.611,85.114 r270 top value=47uF
C5 "Capacitor" C0805 76.436,85.114 r270 top value=47uF
C6 "Capacitor" C0603 78.086,85.014 r270 top value=100nF
C7 "Capacitor" C0805 98.736,84.439 r270 top value="100nF, 100V"
C8 "Capacitor" C0603 128.386,84.214 r0 top value="1nF, 100V"
C9 "Capacitor" C0805 128.961,82.039 r270 top value="100nF, 100V"
C10 "Capacitor" C1206_H1P6 107.286,79.614 r270 top value=1nF
C11 "Capacitor" C0805 73.611,80.314 r90 top value=47uF
C12 "Capacitor" C0603 75.436,80.289 r90 top value=560pF
C13 "Capacitor" C0603 128.411,79.889 r180 top value="1nF, 100V"
C14 "Capacitor" C0603 101.211,77.214 r180 top value="27pF, 100V"
C15 "Capacitor" C0603 131.711,76.964 r180 top value="1nF, 100V"
C16 "Capacitor" C0603 106.336,76.089 r270 top value="1nF, 100V"
C17 "Capacitor" C0603 107.711,76.089 r270 top value="1nF, 100V"
C18 "Capacitor" C1210 101.661,74.914 r180 top value="4.7uF, 100V"
C19 "Capacitor" C0603 136.786,75.164 r0 top value="1nF, 100V"
C20 "Capacitor" C0603 131.711,75.089 r180 top value="1nF, 100V"
C21 "Capacitor" C0603 78.211,73.739 r270 top value=1uF
C22 "Capacitor" C0603 64.225,71.875 r270 top value=2.2uF
C23 "Capacitor" C0402 62.775,71.675 r90 top value=4.7uF
C24 "Capacitor" C0603 46.425,70.125 r270 top value=4.7uF
C25 "Capacitor" C0603 89.461,70.339 r180 top value="1uF, 25V"
C26 "Capacitor" C1210 76.375,68.325 r270 top value=22uF
C27 "Capacitor" C0603 87.461,68.239 r90 top value="100pF, 50V"
C28 "Capacitor" C0603 100.586,67.839 r0 top value="100nF, 50V"
C29 "Capacitor" C0603 89.461,67.539 r0 top value="22nF, 50V"
C30 "Capacitor" C1206_H1P6 96.759,65.91 r180 top value=1nF
C31 "Capacitor" C0603 89.461,66.164 r180 top value="10nF, 50V"
C32 "Capacitor" C0402 75.425,63.975 r180 top value=100nF
C33 "Capacitor" C0603 113.011,60.964 r90 top value="22nF, 50V"
C34 "Capacitor" C0402 115.4,61.3 r180 top value=100nF
C35 "Capacitor" C0402 75.6,60.8 r270 top value=10uF
C36 "Capacitor" C0402 115.4,60.25 r180 top value=100nF
C37 "Capacitor" C0402 79.35,59.65 r180 top value=100nF
C38 "Capacitor" C0603 80.875,57.525 r90 top value=10uF
C39 "Capacitor" C0603 100.461,56.839 r270 top value="470pF, 100V"
C40 "Capacitor" C0603 103.211,56.839 r270 top value="100nF, 50V"
C41 "Capacitor" C0603 104.586,56.839 r270 top value="100nF, 50V"
C42 "Capacitor" C0603 105.961,56.839 r270 top value="1uF, 25V"
C43 "Capacitor" C0402 78.075,56.75 r180 top value=220pF
C44 "Capacitor" C0603 55.25,55.475 r0 top value=2.2uF
C45 "Capacitor" C0402 78.275,55.2 r90 top value=1.5pF
C46 "Capacitor" C0402 117.2,54.425 r90 top value=100nF
C47 "Capacitor" C0402 55.1,54.025 r180 top value=4.7uF
C48 "Capacitor" C0402 78.275,53.3 r270 top value=1.5pF
C49 "Capacitor" C0603 134.675,53 r0 top value=100nF
C50 "Capacitor" C0603 121.55,52.7 r180 top value=1uF
C51 "Capacitor" C0402 121.55,51.55 r180 top value=470pF
C52 "Capacitor" C0603 106.157,49.146 r270 top value="1nF, 100V"
C53 "Capacitor" C0603 67.65,49 r90 top value=2.2uF
C54 "Capacitor" C0402 68.85,49.325 r270 top value=4.7uF
C55 "Capacitor" C0402 121.55,47.425 r0 top value=100nF
C56 "Capacitor" C0603 121.55,46.275 r180 top value=10uF
C57 "Capacitor" C0603 98.961,45.464 r270 top value="100nF, 50V"
C58 "Capacitor" C0603 100.336,45.464 r270 top value="10nF, 100V"
C59 "Capacitor" C0603 101.711,45.464 r270 top value="1nF, 100V"
C60 "Capacitor" C0603 104.961,45.464 r90 top value="10nF, 100V"
C61 "Capacitor" C0402 114.125,44.825 r270 top value=100nF
C62 "Capacitor" C0402 111.425,43.725 r0 top value=100nF
C63 "Capacitor" C0402 104.886,38.989 r0 top value=100nF
C64 "Capacitor" C0603 33.75,38.125 r270 top value=2.2uF
C65 "Capacitor" C0603 35.125,38.125 r270 top value=2.2uF
C66 "Capacitor" C0603 36.5,38.125 r270 top value=2.2uF
C67 "Capacitor" C1206_H1P15 120.381,36.55 r270 top value=2.2uF
C68 "Capacitor" C0402 39.1,37.8 r90 top value=100nF
C69 "Capacitor" C0402 40.025,37.8 r90 top value=100nF
C70 "Capacitor" C0603 104.886,37.839 r0 top value=1uF
C71 "Capacitor" C0603 118.411,36.464 r270 top value=2.2uF
C72 "Capacitor" C0402 112.236,36.389 r90 top value=20pF
C73 "Capacitor" C0603 100.586,35.714 r270 top value=1uF
C74 "Capacitor" C0603 33.25,36.125 r0 top value=4.7uF
C75 "Capacitor" C0402 101.811,35.714 r90 top value=100nF
C76 "Capacitor" C0402 106.986,34.739 r270 top value=10nF
C77 "Capacitor" C0402 33.575,34.975 r180 top value=100nF
C78 "Capacitor" C0603 33.25,33.825 r180 top value=1uF
C79 "Capacitor" C0603 43.975,32.875 r180 top value=1uF
C80 "Capacitor" C0603 33.25,32.45 r0 top value=4.7uF
C81 "Capacitor" C0402 43.65,31.725 r0 top value=100nF
C82 "Capacitor" C0402 33.575,31.3 r180 top value=100nF
C83 "Capacitor" C0603 43.975,30.575 r180 top value=1uF
C84 "Capacitor" C0603 33.25,30.15 r0 top value=4.7uF
C85 "Capacitor" C0402 48.45,29.875 r0 top value=10nF
C86 "Capacitor" C0402 43.65,29.425 r0 top value=100nF
C87 "Capacitor" C0402 54.025,28.45 r270 top value=1uF
C88 "Capacitor" C0603 43.975,28.275 r180 top value=4.7uF
C89 "Capacitor" C0603 35.5,27.5 r270 top value=1uF
C90 "Capacitor" C0603 36.875,27.5 r270 top value=1uF
C91 "Capacitor" C0603 38.25,27.5 r90 top value=4.7uF
C92 "Capacitor" C0603 39.625,27.5 r90 top value=4.7uF
C93 "Capacitor" C0402 48.9,27.5 r90 top value=1uF
C94 "Capacitor" C0805 84.25,25.375 r0 top value=10uF
C95 "Capacitor" C0402 97.85,24.775 r180 top value=100nF
C96 "Capacitor" C0805 97.85,23.375 r0 top value=10uF
C97 "Capacitor" C0805 84.25,23.075 r0 top value=10uF
C98 "capacitor" C0402 53.775,22.775 r180 top value=100nF
C99 "Capacitor" C0402 61.775,22.775 r180 top value=100nF
C100 "Capacitor" C0402 70.275,22.775 r180 top value=100nF
C101 "Capacitor" C0603 120.836,20.839 r90 top value=4.7uF
C102 "Capacitor" C0603 122.211,20.839 r90 top value=1uF
C103 "Capacitor" C0402 111.986,20.789 r90 top value=100nF
C104 "Capacitor" C0402 114.811,20.789 r90 top value=100nF
C105 "Capacitor" C0402 118.736,20.789 r90 top value=100nF
C106 "Capacitor" C0402 119.686,20.789 r90 top value=100nF
C107 "Capacitor" C0603 100.825,20.875 r180 top value=4.7uF
C108 "Capacitor" C0402 110.286,19.214 r0 top value=100nF
C109 "Capacitor" C0402 51.875,14.075 r90 top value=100nF
C110 "Capacitor" C0402 59.875,14.075 r90 top value=100nF
C111 "Capacitor" C0402 68.375,14.075 r90 top value=100nF
C112 "Cap_POL_TANA" CPOL_VISHAY_TANTAL-595D_1407_H220 88.375,12.4 r270 top value=4.7uF
C113 "Capacitor" C0603 113.725,12.5 r270 top value=1uF
C114 "Capacitor" C0603 107.336,12.139 r0 top value=1uF
C115 "Capacitor" C0402 110.061,7.164 r270 top value=100pF
C116 "Capacitor" C0402 94.725,84.8 r90 bottom value=100nF
C117 "Capacitor" C0402 83.8,84.525 r180 bottom value=100nF
C118 "Capacitor" C0402 92.825,76.1 r0 bottom value=100nF
C119 "Capacitor" C0805 92.825,74.65 r180 bottom value=10uF
C120 "Capacitor" C0805 72.4,65.775 r270 bottom value=10uF
C121 "Capacitor" C0402 71.025,65.175 r270 bottom value=100nF
C122 "Capacitor" C0402 70.125,65.175 r270 bottom value=100nF
C123 "Capacitor" C0402 69.2,65.175 r90 bottom value=1uF
C124 "Capacitor" C0402 65.9,64.775 r0 bottom value=100nF
C125 "Capacitor" C0402 63.7,63 r90 bottom value=100nF
C126 "Capacitor" C0402 69.075,63.375 r0 bottom value=100nF
C127 "Capacitor" C0402 70.05,61.75 r90 bottom value=100nF
C128 "Capacitor" C0402 63.275,61.5 r0 bottom value=100nF
C129 "Capacitor" C0402 69.25,59.95 r0 bottom value=100nF
C130 "Capacitor" C0603 62.325,59.55 r180 bottom value=1uF
C131 "Capacitor" C0402 71.275,58.65 r180 bottom value=100nF
C132 "Capacitor" C0402 32.075,58.25 r0 bottom value=100nF
C133 "Capacitor" C0402 63.9,58.225 r0 bottom value=100nF
C134 "Capacitor" C0402 69.125,57.6 r0 bottom value=100nF
C135 "Capacitor" C0402 65.55,57.6 r180 bottom value=100nF
C136 "Capacitor" C0402 37.425,56.925 r90 bottom value=100nF
C137 "Capacitor" C0402 65.55,56.675 r180 bottom value=4.7uF
C138 "Capacitor" C0402 147.325,55.4 r0 bottom value=100nF
C139 "Capacitor" C0402 34.125,54.19 r180 bottom value=100nF
C140 "Capacitor" C0402 61.775,37.825 r180 bottom value=100nF
C141 "Capacitor" C0402 65,33.55 r270 bottom value=100nF
C142 "Capacitor" C1206_H1P15 115.025,32.925 r180 bottom value=2.2uF
C143 "Capacitor" C0402 59.575,32.55 r90 bottom value=100nF
C144 "Capacitor" C0402 116.8,30.55 r90 bottom value=100nF
C145 "Capacitor" C0402 115.625,30.55 r90 bottom value=100nF
C146 "Capacitor" C0402 114.75,30.55 r90 bottom value=100nF
C147 "Capacitor" C0402 113.875,30.55 r90 bottom value=100nF
C148 "Capacitor" C0402 119.95,29.9 r180 bottom value=100nF
C149 "Capacitor" C0402 119.95,29.025 r180 bottom value=100nF
C150 "Capacitor" C0402 110.575,28.975 r0 bottom value=100nF
C151 "Capacitor" C0402 119.95,28.1 r180 bottom value=100nF
C152 "Capacitor" C0402 110.575,28.025 r0 bottom value=100nF
C153 "Capacitor" C0402 110.575,27.1 r0 bottom value=100nF
C154 "Capacitor" C0402 116.875,26.075 r270 bottom value=100nF
C155 "Capacitor" C0402 110.575,26.175 r0 bottom value=100nF
C156 "Capacitor" C0402 114.9,24.125 r90 bottom value=100nF
C157 "Capacitor" C0402 112.975,24.125 r90 bottom value=100nF
C158 "Capacitor" C0402 36.549,7.198 r90 bottom value=100nF
CN1 "SMA-J-P-H-ST-EM1" CON_SAMTEC_SMA-J-P-X-ST-EM1 62.725,88 r180 top
CN2 "microSD-PJS008-2003" CON_MICROSD_YAMAICHI_PJS008-2003-1 47.2,88 r90 top value=PJS008-2003-1
CN3 "RJ45_KRJ-CB4.2GYZNL" CON_RJ45_DGKYD_KRJ-CB4.2GYZNL 117.3,88.025 r180 top value=KRJ-CB4.2GYZNL
CN4 "Socket 10x1" CON_SAMTEC_SSW-110-22-X-S-VS 126.086,45.214 r270 top
CN5 "Socket 8x1" CON_SAMTEC_SSW-108-22-X-S-VS 77.826,38.61 r90 top
CN6 "Header 4x1" CON_SAMTEC_TSW-104-07-G-S 153.581,30.157 r270 top
CN7 "Header 7x2" CON_STDC14_Receiver_MEDIUM_WITH_MIPI10_3D 5.511,25.339 r270 top value="MIPI10 on STDC14 footprint"
CN8 "Socket 8x1" CON_SAMTEC_SSW-108-22-X-S-VS 126.086,20.83 r270 top
CN9 "Socket 6x1" CON_SAMTEC_SSW-106-22-X-S-VS 77.826,18.29 r90 top
CN10 "Jack_PJ3028B-3_3P" CON_PHONE-JACK-3P5_HY_PJ3028B 32.225,0 r90 top value=PJ3028B-3_GR
CN11 "Jack_PJ3028B-3_3P" CON_PHONE-JACK-3P5_HY_PJ3028B 44.55,0 r90 top value=PJ3028B-3_BE
CN12 "Jumper_Header 2x1" CON_SAMTEC_TSW-102-07-G-S 18.453,5.613 r90 top value="Shunt not fitted"
CN13 "Jumper_Header 2x1" CON_SAMTEC_TSW-102-07-G-S 23.533,5.613 r90 top value="Shunt not fitted"
CN14 "USB_uAB_47590.0001" CON_USBMICROAB_MOLEX_47590-0001_H3 83.775,0 r0 top
CN15 "USB_uB_105017.0001" CON_USBMICROB_MOLEX_105017-0001_H2P90 114.775,0 r0 top value=USB_uB_105017-0001
CN16 "Header 2x1" CON_988-JIUBABA_PHFS25-11-02-G0B115-T-1 53.85,3.475 r180 top value="header 2x1"
CN17 "Header 2x1" CON_988-JIUBABA_PHFS25-11-02-G0B115-T-1 62.1,3.475 r180 top value="header 2x1"
CN18 "Header 2x1" CON_988-JIUBABA_PHFS25-11-02-G0B115-T-1 70.85,3.475 r180 top value="header 2x1"
CN19 "Header 25x2" MOD_LCD_MB1046B__CON_SAMTEC_FLE-125-01-G-DV 79.5,88 r180 bottom locked
CN20 "Socket 10x2" CON_FCI_20021311-XXX20XXLF 7.06,42.037 r90 bottom locked value=20021311-00020T4LF
CN21 "Tag-10-C" CON_TAG-C_TC2050-IDC-NL 7.125,14.45 r180 bottom value=TC2050-IDC-NL
D1 "SMAJ58A-TR" DIO_SMA_1A_2K 131.561,82.189 r270 top
D2 "STPS2L40UF" DIO_SMB-FLAT_1A_2K 78.711,78.539 r270 top
D3 "DIODE_1A_2K" DIO_SOD323_1A_2K 104.436,79.914 r270 top value=BAT46JFILM
D4 "DF01S" BRF_VISHAY_DFS_DF01S 127.886,67.964 r0 top
D5 "DF01S" BRF_VISHAY_DFS_DF01S 136.911,67.964 r0 top
D6 "DIODE_1A_2K" DIO_SOD323_1A_2K 98.661,60.364 r180 top value=BAT46JFILM
D7 "SMAJ58A-TR" DIO_SMA_DO214-AC_1A_2K 108.836,51.239 r270 top value=STPS1H100A
D8 "BAT60JFILM" DIO_SOD323 99.236,31.014 r90 top
D9 "BAT60JFILM" DIO_SOD323 101.186,31.014 r90 top
D10 "BAT60JFILM" DIO_SOD323 103.111,31.014 r90 top
D11 "BAT60JFILM" DIO_SOD323 105.014,31.014 r90 top
H1 "POSITION HOLE" PTH_350_700 5,83 r0 top
H2 "POSITION HOLE" PTH_350_700 154,83 r0 top
H3 "POSITION HOLE" PTH_350_700 5,5 r0 top
H4 "POSITION HOLE" PTH_350_700 154,5 r0 top
JP1 "Jumper_Header 2x1 Fitted" CON_SAMTEC_TSW-102-07-G-S 61.35,46.975 r180 top value="Shunt Fitted"
JP2 "Jumper_Header 2x1" CON_SAMTEC_TSW-102-07-G-S 19.901,32.385 r180 top value="Shunt not fitted"
JP3 "Jumper_Header 2x1" CON_SAMTEC_TSW-102-07-G-S 153.277,18.517 r180 top value="Shunt not fitted"
JP4 "Jumper_Header 2x1" CON_SAMTEC_TSW-102-07-G-S 53.95,10.45 r180 top value="Shunt not fitted"
JP5 "Jumper_Header 2x1" CON_SAMTEC_TSW-102-07-G-S 61.95,10.45 r180 top value="Shunt not fitted"
JP6 "Jumper_Header 2x1" CON_SAMTEC_TSW-102-07-G-S 70.7,10.45 r180 top value="Shunt not fitted"
JP7 "Header 5x2" CON_988-JIUBABA_PHFS25-12-10-G0B115-T-1 99.375,4.675 r180 top
L1 "Inductor" IND_POWER_COILCRAFT_ME3220 101.511,71.614 r0 top value=5.6uH
L2 "Inductor" IND_TAIYO-YUDEN_FBMJ1608 76.825,60.725 r270 top value=FBMJ1608HM180NTR
L3 "Inductor" IND_2016_MURATA_LQM2MPN2R2NG0 76.075,57.55 r270 top value=2.2uH
L4 "BEAD" L0603 111.075,44.95 r180 top value=600R@100MHz
L5 "BEAD" L0603 71.9,61.5 r180 bottom value=600R@100MHz
LD1 "LED_green" LED_0603_GREEN 153.7,44.075 r180 bottom value=GREEN
LD2 "LED_red" LED_0603_RED 153.7,46.3 r180 bottom value=RED
LD3 "LED_red" LED_0603_VISHAY_VLMS1300-GS08_RED_1A2K_H0P8 116.311,13.064 r180 top value=RED
LD4 "LED_green" LED_0603_GREEN 80.05,6.925 r90 top value=GREEN
LD5 "LED_green" LED_0603_VISHAY_VLMTG1300-GS08_GREEN_1A2K_H0P8 107.611,6.514 r90 top value="TRUE GREEN"
LD6 "LD_BICOLOR_CMS" LED_BI-GR_HSMF-A201-A00J1 120.086,13.689 r180 top
LD7 "LED_red" LED_0603_RED 92.901,16.688 r180 top value=RED
LD8 "LED_green" LED_0603_GREEN 153.675,42.075 r0 bottom value=GREEN
MIRE1 "Comment" MIRE_PLACE_SMD_0P8MM 11.375,85.725 r270 top
MIRE2 "Comment" LOGO_ETIQUETTE 148.3,77.475 r270 top
MIRE3 "Comment" LOGO_ETIQUETTE 18,61.85 r270 top
MIRE4 "Comment" MIRE_PLACE_SMD_0P8MM 148.45,2 r270 top
MIRE5 "Comment" MIRE_PLACE_SMD_0P8MM 11.075,2.95 r270 top
MIRE6 "Comment" MIRE_PLACE_SMD_0P8MM 147.6,83.85 r270 bottom
MIRE7 "Comment" MIRE_PLACE_SMD_0P8MM 10.8,81.35 r270 bottom
MIRE8 "Comment" MIRE_PLACE_SMD_0P8MM 147.05,6.775 r270 bottom
P1 "Socket 6X2 PMOD" CON_SAMTEC_SSW-106-02-F-D-RA__PMOD 21.7,76.35 r0 bottom
P2 "Socket 10X2 STMod+" CON_SAMTEC_SQT-110-01-F-D-RA__STMOD+ 8.975,63 r90 bottom
Q1 "9013-SOT23" NPN_SOT23 76.175,7.525 r0 top value=SOT23
R1 "Resistor" R0805 107.211,84.664 r90 top value=0R_0805
R2 "Resistor" R0603 79.711,83.339 r90 top value=0R
R3 "Resistor" R0603 37.35,81.9 r270 top value=10K
R4 "Resistor" R0805 101.386,81.214 r180 top value=68R
R5 "Resistor" R1206_H0P55 101.386,79.114 r180 top value=200R
R6 "Resistor" R0402 128.382,78.483 r180 top value=330R
R7 "Resistor" R0805 75.436,77.089 r90 top value=15R
R8 "Resistor" R0603 103.961,77.189 r0 top value=10K
R9 "Resistor" R0805 128.763,76.959 r180 top value=75R
R10 "Resistor" R0805 134.361,76.039 r90 top value=0R_0805
R11 "Resistor" R0805 139.461,76.039 r90 top value=0R_0805
R12 "Resistor" R0805 128.761,75.089 r180 top value=75R
R13 "Resistor" R0402 110.6,74.55 r90 top value=330R
R14 "Resistor" R0805 106.711,73.264 r270 top value=75R
R15 "Resistor" R0805 108.586,73.264 r270 top value=75R
R16 "Resistor" R0402 79.536,73.689 r270 top value=120K
R17 "Resistor" R0805 104.761,71.614 r90 top value=10R
R18 "Resistor" R0805 89.536,71.964 r180 top value=0R_0805
R19 "Resistor" R0603 84.711,72.164 r180 top value=13K
R20 "Resistor" R0603 87.111,71.689 r90 top value=20K
R21 "Resistor" R0603 84.711,70.739 r0 top value=13K
R22 "Resistor" R0603 100.586,69.214 r180 top value=1K
R23 "Resistor" R0603 89.461,68.939 r0 top value=10K
R24 "Resistor" R0402 65.475,68.675 r270 top value=33R
R25 "Resistor" R0402 59.2,65.9 r0 top value=33R
R26 "Resistor" R0603 89.461,64.764 r0 top value=1K
R27 "Resistor" R0402 42.45,64.575 r270 top value=47K
R28 "Resistor" R0402 43.525,64.575 r270 top value=47K
R29 "Resistor" R0402 44.75,64.575 r270 top value=47K
R30 "Resistor" R0402 48.475,64.575 r270 top value=47K
R31 "Resistor" R0402 49.55,64.575 r270 top value=47K
R32 "Resistor" R0402 59.2,64.825 r0 top value=33R
R33 "Resistor" R0805 97.961,63.014 r90 top value=0R_0805
R34 "Resistor" R0805 99.836,63.014 r270 top value=56R
R35 "Resistor" R0402 76.975,63.3 r270 top value=51R
R36 "Resistor" R0402 75.425,62.975 r180 top value=51R
R37 "Resistor" R0402 32.975,61.675 r90 top value=33R
R38 "Resistor" R0402 34.05,61.675 r270 top value=33R
R39 "Resistor" R0402 35.125,61.675 r270 top value=33R
R40 "Resistor" R0402 36.2,61.675 r270 top value=33R
R41 "Resistor" R0402 81.525,61.3 r90 top value=10K
R42 "Resistor" R0805 119.361,60.639 r270 top value=0R_0805
R43 "Resistor" R1206_H0P55 108.511,59.514 r180 top value=0R47
R44 "Resistor" R0603 98.711,58.689 r0 top value=10K
R45 "Resistor" R0402 29.7,58.6 r180 top value=33R
R46 "Resistor" R0402 38.3,58.025 r0 top value=33R
R47 "Resistor" R0603 101.811,56.839 r90 top value=510R
R48 "Resistor" R0402 29.7,57.35 r0 top value=33R
R49 "Resistor" R0402 118.2,56.525 r90 top value=10K
R50 "Resistor" R0402 119.275,56.525 r90 top value=10K
R51 "Resistor" R0402 115.125,56.15 r270 top value=10K
R52 "Resistor" R0402 29.7,56.025 r180 top value=33R
R53 "Resistor" R0402 38.3,55.9 r0 top value=33R
R54 "Resistor" R0603 76.625,54.975 r0 top value=0R_0603_ULO
R55 "Resistor" R0402 114.05,54.425 r90 top value=1K5
R56 "Resistor" R0402 115.125,54.425 r270 top value=33R
R57 "Resistor" R0402 116.2,54.425 r90 top value=10K
R58 "Resistor" R0402 118.2,54.425 r270 top value=33R
R59 "Resistor" R0402 119.275,54.425 r270 top value=33R
R60 "Resistor" R0402 38.3,54.65 r0 top value=33R
R61 "Resistor" R0603 106.157,53.337 r270 top value=0R
R62 "Resistor" R0603 76.625,53.525 r0 top value=0R_0603_ULO
R63 "Resistor" R0402 71.85,52.2 r90 top value=10K
R64 "Resistor" R0402 72.9,52.2 r90 top value=10K
R65 "Resistor" R0402 34.525,51.2 r270 top value=10K
R66 "Resistor" R0402 35.7,51.195 r90 top value=33R
R67 "Resistor" R0402 112.075,50.725 r0 top value=10K
R68 "Resistor" R0402 121.55,50.55 r180 top value=100R
R69 "Resistor" R0603 98.918,49.146 r90 top value=124K
R70 "Resistor" R0402 121.55,49.475 r0 top value=10K
R71 "Resistor" R0402 121.55,48.4 r180 top value=10K
R72 "Resistor" R0603 73.211,47.514 r0 top value=1K
R73 "Resistor" R0603 136.361,45.789 r270 top value=1M
R74 "Resistor" R0805 103.336,45.139 r90 top value=2K
R75 "Resistor" R0603 106.361,45.464 r90 top value=75K
R76 "Resistor" R0402 115.125,44.825 r270 top value=49.9R
R77 "Resistor" R0402 116.2,44.825 r270 top value=49.9R
R78 "Resistor" R0402 117.275,44.825 r270 top value=49.9R
R79 "Resistor" R0402 118.35,44.825 r270 top value=49.9R
R80 "Resistor" R0402 119.4,44.825 r270 top value=12K1
R81 "Resistor" R0402 63.15,38.925 r90 top value=10K
R82 "Resistor" R0402 64.225,38.925 r270 top value=33R
R83 "Resistor" R0402 65.3,38.925 r90 top value=33R
R84 "Resistor" R0603 37.9,38.125 r90 top value=20R
R85 "Resistor" R0603 41.225,38.125 r90 top value=20R
R86 "Resistor" R0603 42.65,38.125 r270 top value=4K7
R87 "Resistor" R0402 57.45,37.05 r0 top value=33R
R88 "Resistor" R0402 113.236,36.389 r90 top value=100R
R89 "Resistor" R0402 117.111,36.389 r270 top value=3K
R90 "Resistor" R0402 43.65,36.225 r0 top value=1K5
R91 "Resistor" R0402 57.45,35.975 r0 top value=33R
R92 "Resistor" R0402 43.65,35.15 r0 top value=1K5
R93 "Resistor" R0402 57.45,34.9 r0 top value=33R
R94 "Resistor" R0402 43.65,34.1 r180 top value=10K
R95 "Resistor" R0402 57.45,33.775 r0 top value=33R
R96 "Resistor" R0402 57.45,32.65 r0 top value=33R
R97 "Resistor" R0402 121.761,31.439 r0 top value=100R
R98 "Resistor" R0402 60.15,30.2 r90 top value=33R
R99 "Resistor" R0402 61.225,30.2 r90 top value=33R
R100 "Resistor" R0402 62.3,30.2 r270 top value=33R
R101 "Resistor" R0402 63.375,30.2 r270 top value=33R
R102 "Resistor" R0402 67.675,30.35 r0 top value=10K
R103 "Resistor" R0402 14.261,27.939 r0 top value=22R
R104 "Resistor" R0402 14.261,26.739 r0 top value=22R
R105 "Resistor" R0402 121.761,25.989 r180 top value=10K
R106 "Resistor" R0402 14.261,25.489 r0 top value=22R
R107 "Resistor" R0402 121.761,24.939 r180 top value=2K7
R108 "Resistor" R0402 14.261,24.239 r0 top value=22R
R109 "Resistor" R0402 121.761,23.864 r180 top value=4K7
R110 "Resistor" R0402 14.175,21.175 r0 top value=22R
R111 "Resistor" R0402 113.811,20.789 r90 top value=100R
R112 "Resistor" R0402 116.661,20.789 r270 top value=4K7
R113 "Resistor" R0402 117.736,20.789 r270 top value=4K7
R114 "Resistor" R0402 14.175,20 r180 top value=22R
R115 "Resistor" R0402 110.286,17.964 r0 top value=10K
R116 "Resistor" R0402 89.9,16.675 r90 top value=0R
R117 "Resistor" R0402 90.975,16.675 r90 top value=47K
R118 "Resistor" R0402 95.187,16.764 r0 top value=620R
R119 "Resistor" R0402 53.125,14.075 r270 top value=120R
R120 "Resistor" R0402 55.675,14.075 r270 top value=10K
R121 "Resistor" R0402 61.15,14.075 r270 top value=120R
R122 "Resistor" R0402 63.675,14.075 r270 top value=10K
R123 "Resistor" R0402 69.625,14.075 r270 top value=120R
R124 "Resistor" R0402 72.175,14.075 r270 top value=10K
R125 "Resistor" R0402 113.886,14.364 r0 top value=47K
R126 "Resistor" R0402 116.261,14.364 r180 top value=1K
R127 "Resistor" R0402 107.661,14.064 r180 top value=10K
R128 "Resistor" R0402 95.175,13.025 r180 top value=0R
R129 "Resistor" R0402 95.175,11.95 r180 top value=10K
R130 "Resistor" R0603 119.336,9.964 r270 top value=330R
R131 "Resistor" R0603 120.836,9.964 r270 top value=330R
R132 "Resistor" R0402 78.9,6.625 r90 top value=330R
R133 "Resistor" R0402 76.2,5.025 r0 top value=22K
R134 "Resistor" R0603 107.611,3.839 r90 top value=1K
R135 "Resistor" R0402 76.2,3.95 r0 top value=47K
R136 "Resistor" R0402 83.8,85.55 r0 bottom value=0R
R137 "Resistor" R0603 95.075,75.35 r270 bottom value=0R
R138 "Resistor" R0603 90.6,75.35 r270 bottom value=0R
R139 "Resistor" R0603 71.6,63.05 r180 bottom value=0R
R140 "Resistor" R0402 147.325,56.4 r0 bottom value=100R
R141 "Resistor" R0402 147.325,54.4 r180 bottom value=330R
R142 "Resistor" R0402 147.325,53.35 r0 bottom value=220K
R143 "Resistor" R0603 150.625,46.3 r0 bottom value=680R
R144 "Resistor" R0603 150.625,44.075 r0 bottom value=510R
R145 "Resistor" R0603 150.625,42.075 r180 bottom value=510R
R146 "Resistor" R0402 2.836,22.789 r180 bottom value=100R
R147 "Resistor" R0402 14.55,16.9 r180 bottom value=22R
R148 "Resistor" R0402 14.55,15.85 r180 bottom value=22R
R149 "Resistor" R0402 151.55,15 r0 bottom value=10K
R150 "Resistor" R0402 14.55,14.775 r180 bottom value=22R
R151 "Resistor" R0402 14.575,13.725 r180 bottom value=22R
R152 "Resistor" R0402 14.55,12.65 r180 bottom value=22R
R153 "Resistor" R0402 14.55,11.6 r180 bottom value=22R
R154 "Resistor" R0402 38.81,6.965 r180 bottom value=10K
SB1 "SB_ON" SOLDER-BRIDGE_R0603-0R 61.35,69.225 r270 top
SB2 "SB_ON" SOLDER-BRIDGE_R0603-0R 62.775,69.225 r270 top
SB3 "SB_ON" SOLDER-BRIDGE_R0603-0R 64.225,69.225 r270 top
SB4 "SB_ON" SOLDER-BRIDGE_R0603-0R 71.275,69.225 r270 top
SB5 "SB_ON" SOLDER-BRIDGE_R0603-0R 72.725,69.225 r270 top
SB6 "SB_ON" SOLDER-BRIDGE_R0603-0R 13.7,60.825 r180 bottom
SB7 "SB_ON" SOLDER-BRIDGE_R0603-0R 13.7,62.275 r180 bottom
SB8 "SB_ON" SOLDER-BRIDGE_R0603-0R 13.7,63.7 r180 bottom
SB9 "SB_ON" SOLDER-BRIDGE_R0603-0R 117.65,60.6 r270 top
SB10 "SB_ON" SOLDER-BRIDGE_R0603-0R 13.7,65.15 r180 bottom
SB11 "SB_ON" SOLDER-BRIDGE_R0603-0R 55.225,60.725 r0 top
SB12 "SB_ON" SOLDER-BRIDGE_R0603-0R 13.7,66.575 r180 bottom
SB13 "SB_ON" SOLDER-BRIDGE_R0603-0R 78.725,58.225 r180 top
SB14 "SB_ON" SOLDER-BRIDGE_R0603-0R 13.7,68.025 r180 bottom
SB15 "SB_ON" SOLDER-BRIDGE_R0603-0R 13.7,69.45 r180 bottom
SB16 "SB_ON" SOLDER-BRIDGE_R0603-0R 57.9,55.475 r0 top
SB17 "SB_ON" SOLDER-BRIDGE_R0603-0R 13.7,70.9 r180 bottom
SB18 "SB_ON" SOLDER-BRIDGE_R0603-0R 57.9,54.025 r0 top
SB19 "SB_ON" SOLDER-BRIDGE_R0603-0R 67.65,51.65 r90 top
SB20 "SB_ON" SOLDER-BRIDGE_R0603-0R 69.1,51.65 r90 top
SB21 "SB_ON" SOLDER-BRIDGE_R0603-0R 70.525,51.65 r90 top
SB22 "SB_ON" SOLDER-BRIDGE_R0603-0R 74.15,51.65 r90 top
SB23 "SB_ON" SOLDER-BRIDGE_R0603-0R 134.725,51.575 r0 top
SB24 "SB_ON" SOLDER-BRIDGE_R0603-0R 33.05,50.65 r90 top
SB25 "SB_ON" SOLDER-BRIDGE_R0603-0R 134.186,46.489 r180 top
SB26 "SB_ON" SOLDER-BRIDGE_R0603-0R 68.85,33.525 r180 top
SB27 "SB_ON" SOLDER-BRIDGE_R0603-0R 65.325,30.35 r0 top
SB28 "SB_ON" SOLDER-BRIDGE_R0603-0R 34.1,27.275 r90 top
SB29 "SB_ON" SOLDER-BRIDGE_R0603-0R 51.875,23.85 r90 top
SB30 "SB_ON" SOLDER-BRIDGE_R0603-0R 55.675,23.85 r90 top
SB31 "SB_ON" SOLDER-BRIDGE_R0603-0R 84.311,16.189 r180 top
SB32 "SB_ON" SOLDER-BRIDGE_R0603-0R 84.311,14.764 r180 top
SB33 "SB_ON" SOLDER-BRIDGE_R0603-0R 84.311,13.339 r180 top
SB34 "SB_ON" SOLDER-BRIDGE_R0603-0R 84.311,11.914 r180 top
SB35 "SB_ON" SOLDER-BRIDGE_R0603-0R 42.149,7.123 r180 bottom
SB36 "SB_ON" SOLDER-BRIDGE_R0603-0R 34.512,6.319 r90 bottom
SB37 "SB_ON" SOLDER-BRIDGE_R0603-0R 34.512,3.177 r270 bottom
SB38 "SB_ON" SOLDER-BRIDGE_R0603-0R 42.299,3.123 r0 bottom
SB39 "SB_ON" SOLDER-BRIDGE_R0603-0R 36.9,1.675 r0 bottom
SB40 "SB_ON" SOLDER-BRIDGE_R0603-0R 42.299,1.673 r0 bottom
SB41 "SB_ON" SOLDER-BRIDGE_R0603-0R 72.725,73.175 r90 top
SB42 "SB_ON" SOLDER-BRIDGE_R0603-0R 74.15,73.175 r90 top
SB43 "SB_ON" SOLDER-BRIDGE_R0603-0R 87.9,85.4 r90 bottom
SB44 "SB_ON" SOLDER-BRIDGE_R0603-0R 86.4,85.4 r90 bottom
SW1 "SW_MECA_1K2" SWI_EAO_09-03290-01_EXTENDED_STRAIGHT_BLACK 151.981,12.878 r90 bottom value="Mechanical Slide Switch 1K2"
T1 "TRS_750315923" TRS_WURTH_750315923 91.813,79.255 r180 top value=750315923
T2 "POE30P-50L" TRS_COILCRAFT_POE30P-50L 88.765,79.255 r180 top
T3 "H2019NL" TRS_PULSE_H2019NL 116.186,67.789 r0 top
T4 "STN4NF20L" MOS_SOT223-TAB 105.169,64.953 r0 top
T5 "BSN20" MOS_SOT23 139.186,45.789 r270 top
TP1 "Test Point" TP_SMD_0-3MM 56.4,68.4 r90 top
TP2 "Test Point" TP_SMD_0-3MM 87.4,53.725 r90 top
TP3 "Test Point" TP_SMD_1MM 112.261,41.514 r90 top value=1mm
TP4 "Test Point" TP_SMD_0-3MM 46.9,27.95 r180 top
TP5 "Test Point" TP_SMD_0-3MM 98.3,26.175 r270 top
U1 "REF6225IDGKT" ICC_VSSOP8_DGK_S-PDSO-G8_3X3_P065 79.875,69.2 r180 top
U2 "HMHA2801A" OPT_MINI-FLAT_FAIRCHILD_HMHA2801A 94.961,68.889 r90 top
U3 "TS431AILT" MOS_SOT23-5L 84.761,67.964 r0 top
U4 "HSP051-4M10" ESD_UQFN-10L_2P5X1_P050 43.725,66.825 r180 top
U5 "HSP051-4M10" ESD_UQFN-10L_2P5X1_P050 48.25,66.825 r180 top
U6 "STM32H725IGK6U" ICC_UFBGA201_176+25_10X10_P065 67.3,61.175 r180 top locked value=STM32H725IGK6
U7 "S70KL1281DABHI023" ICC_FBGA24_5X5-BALL-ARRAY_6X8_P1 34.05,56.425 r180 top locked
U8 "PM8800ATR" ICC_HTSSOP16-EPAD_5X4P4_P065 102.576,51.196 r0 top
U9 "LAN8742A-CZ-TR" ICC_VQFN24-EPAD_4X4_P050 116.75,49.8 r180 top
U10 "MX25LM51245GXDI00" ICC_BGA24_5X5-BALL-ARRAY_6X8_P1 62.775,34.55 r270 top
U11 "LD3985M33R" REG_SOT23-5L 104.486,35.239 r270 top
U12 "WM8994ECS/R" ICC_W-CSP-BGA72_4P511X4P023_P050 38.225,32.875 r180 top
U13 "ST-LINKV3E_SWD" ICC_UFBGA201_176+25_10X10_P065 115.233,28.027 r90 top
U14 "LD3985M18R" REG_SOT23-5L 51.425,28.925 r90 top
U15 "LD1117S50TR" REG_SOT223-TAB 89.95,25.375 r270 top
U16 "ESDALC6V1W5" ESD_SOT323-5L 11.561,26.239 r0 top
U17 "ST1L05APU33R" ICC_DFN6-EPAD_3X3_P095 101.425,23.375 r270 top
U18 "ESDALC6V1W5" ESD_SOT323-5L 11.561,21.489 r0 top
U19 "ESDA6V1BC6" ESD_SOT23-6L 38.65,21.1 r270 top
U20 "MCP2562FD" ICC_SO8_5X4_P127 53.775,18.725 r180 top value=MCP2562FDT-H/SN
U21 "MCP2562FD" ICC_SO8_5X4_P127 61.775,18.725 r180 top value=MCP2562FDT-H/SN
U22 "MCP2562FD" ICC_SO8_5X4_P127 70.275,18.725 r180 top value=MCP2562FDT-H/SN
U23 "STMPS2151STR" MOS_SOT23-5L 110.861,13.114 r90 top
U24 "STMPS2151STR" MOS_SOT23-5L 92.025,12.9 r270 top
U25 "USBLC6-4SC6" ESD_SOT23-6L 83.9,8.1 r90 top
U26 "ESD-TRANSIL-DUAL-BIDIR" DIO_SOT323 53.85,7.15 r0 top value=ESDCAN05-2BWY
U27 "ESD-TRANSIL-DUAL-BIDIR" DIO_SOT323 62.1,7.15 r0 top value=ESDCAN05-2BWY
U28 "ESD-TRANSIL-DUAL-BIDIR" DIO_SOT323 70.85,7.15 r0 top value=ESDCAN05-2BWY
U29 "ECMF02-2AMX6" ESD_QFN-6L_1P7X1P5_P050 114.186,7.314 r180 top
U30 "ESD-TRANSIL" ESD_QFN2_1P6X1_P125 111.336,7.339 r90 top value=ESDA7P60-1U1M
U31 "ESD-TRANSIL" ESD_QFN2_1P6X1_P125 147.5,66.375 r90 bottom value=ESDA7P60-1U1M
U32 "ESD-TRANSIL" ESD_QFN2_1P6X1_P125 147.325,52 r180 bottom value=ESDA7P60-1U1M
U33 "MP34DT01TR-M" MIC_HCLGA_3X4X1_4LD 38.399,4.523 r90 bottom
U34 "ESD-TRANSIL" ESD_ST0201 9.975,24.075 r0 top value=ESDALC6V1-1U2
X1 "OSCILLATOR_4_PINS" OSC_NDK_NZ2520SB_4P 79.475,61.675 r90 top value="NZ2520SH 25MHz"
X2 "XTAL_2_PINS" CRY_NX3215SA_2P 79.925,54.25 r270 top value="NX3215SA 32.768KHz"
X3 "OSCILLATOR_4_PINS" OSC_NDK_NZ2520SB_4P 112.786,18.589 r0 top value="NZ2520SH 25MHz"

## Footprints (in the part's own frame and the unit in brackets; to place one, negate y for a bottom-side part, rotate by r counter-clockwise, add the part's x,y. Pads: shape width x height; smd on the part's side, far side on the other; paste and mask are expansions set on the pad)
BRF_VISHAY_DFS_DF01S [mm]
  rect 1.5x1.9 smd mask+0.05: 1(-2.55,-4.39) 2(2.55,-4.39) 3(2.55,4.39) 4(-2.55,4.39)
  silkscreen extent -4.36,-4.5 4.36,4.72, body extent -4.25,-5.15 4.26,5.15, height 3.57
C0402 [mm]
  rect 0.51x0.56 smd mask+0.05: 1(-0.45,0) 2(0.45,0)
  silkscreen extent 0,-0.3 0,0.3, body extent -0.5,-0.3 0.5,0.3, height 0.4
C0603 [mm]
  rect 0.64x0.89 smd mask+0.05: 1(-0.7,0) 2(0.7,0)
  silkscreen extent -1.05,-0.55 1.02,0.55, body extent -0.9,-0.5 0.9,0.5, height 1.4
C0805 [mm]
  rect 0.9x1.4 smd mask+0.05: 1(-0.85,0) 2(0.85,0)
  silkscreen extent -1.3,-0.77 1.3,0.77, body extent -1.1,-0.7 1.1,0.7, height 1.35
C1206_H1P6 [mm]
  rect 1.4x1.78 smd mask+0.05: 1(-1.4,0) 2(1.4,0)
  silkscreen extent -2.12,-0.97 2.15,0.97, body extent -1.7,-0.9 1.7,0.9, height 1.8
C1206_H1P15 [mm]
  rect 1.4x1.78 smd mask+0.05: 1(-1.4,0) 2(1.4,0)
  silkscreen extent -2.12,-0.97 2.15,0.97, body extent -1.7,-0.9 1.7,0.9, height 1.35
C1210 [mm]
  rect 1.4x2.6 smd mask+0.05: 1(-1.4,0) 2(1.4,0)
  silkscreen extent -2.1,-1.43 2.1,1.43, body extent -1.75,-1.35 1.75,1.35, height 2.5
CON_988-JIUBABA_PHFS25-11-02-G0B115-T-1 [mm]
  rect 1.6x1.6 hole 1 mask+0.05: 1(1.27,0)
  round 1.6 hole 1 mask+0.05: 2(-1.27,0)
  silkscreen extent -2.71,-1.33 2.71,1.33, body extent -2.71,-1.33 2.71,1.33, height 8.85
CON_988-JIUBABA_PHFS25-12-10-G0B115-T-1 [mm]
  rect 1.7x1.7 hole 1.1 mask+0.05: 1(-5.08,-1.27)
  round 1.7 hole 1.1 mask+0.05: 2(-5.08,1.27) 3(-2.54,-1.27) 4(-2.54,1.27) 5(0,-1.27) 6(0,1.27) 7(2.54,-1.27) 8(2.54,1.27) 9(5.08,-1.27) 10(5.08,1.27)
  silkscreen extent -6.6,-2.6 6.6,2.6, body extent -6.6,-2.6 6.6,2.6, height 8.85
CON_FCI_20021311-XXX20XXLF [mm]
  rect 1x1 / inner round 1 / far side rect 1x1 hole 0.7 mask+0.05: 1(5.715,0.635)
  round 1 hole 0.7 mask+0.05: 2(5.715,-0.635) 3(4.445,0.635) 4(4.445,-0.635) 5(3.175,0.635) 6(3.175,-0.635) 7(1.905,0.635) 8(1.905,-0.635) 9(0.635,0.635) 10(0.635,-0.635) 11(-0.635,0.635) 12(-0.635,-0.635) 13(-1.905,0.635) 14(-1.905,-0.635) 15(-3.175,0.635) 16(-3.175,-0.635) 17(-4.445,0.635) 18(-4.445,-0.635) 19(-5.715,0.635) 20(-5.715,-0.635)
  silkscreen extent -6.58,-1.5 6.58,1.5, body extent -6.58,-1.5 6.58,1.5, height 4.4
CON_MICROSD_YAMAICHI_PJS008-2003-1 [mm] "WITH POSITIONNING PINS"
  rect 1.6x0.8 smd paste+0 mask+0.05: 1(-15.6,-2.525) 2(-15.6,-1.425) 3(-15.6,-0.325) 4(-15.6,0.775) 5(-15.6,1.875) 6(-15.6,2.975) 7(-15.6,4.075) 8(-15.6,5.175) 9(-15.6,6.325)
  rect 1.4x1.95 smd paste+0 mask+0.05: 10(-5.4,7.225)
  rect 3.5x1.5 smd paste+0 mask+0.05: 11(-2.45,7.45)
  rect 3.5x1.4 smd paste+0 mask+0.05: 12(-2.45,-7.5)
  rect 3.5x1.6 smd paste+0 mask+0.05: 13(-13.45,-7.4)
  rect 3.1x1.2 smd paste+0 mask+0.05: 14(-13.95,7.6)
  round 0 hole 0.65 unplated mask+0.05: NPTH1(-9.8,-4)
  round 0 hole 0.7 unplated mask+0.05: NPTH2(-9.8,3.55)
  silkscreen extent -15.32,-7.25 5.65,7.25, body extent -15.25,-7.25 -0.45,7.42, height 2
CON_PHONE-JACK-3P5_HY_PJ3028B [mm]
  rect 1.5x2.5 smd mask+0.05: 2(1.25,-3.45) 7(2.85,3.45)
  rect 2x2.5 smd mask+0.05: 3(4,-3.45) 4(5.8,3.45) 6(13.2,-3.45)
  rect 2.5x2 smd mask+0.05: 5(17.25,0.75)
  round 0.5 hole 2 unplated mask+0.1: MT1(5,0) MT2(12,0)
  Multi-Layer keep-out circle w0.01: c5,0 r1.25
  Multi-Layer keep-out circle w0.01: c12,0 r1.25
  silkscreen extent -0.9,-3.7 16,3, body extent -0.9,-3 16,3, height 5
CON_RJ45_DGKYD_KRJ-CB4.2GYZNL [mm] "RJ45  connector, right angle"
  rect 1x1 hole 0.7 mask+0.05: 1(3.57,10.6)
  round 1 hole 0.7 mask+0.05: 2(2.55,11.7) 3(1.53,10.6) 4(0.51,11.7) 5(-0.51,10.6) 6(-1.53,11.7) 7(-2.55,10.6) 8(-3.57,11.7) 9(7.06,9.52) 10(4.77,9.52) 11(-4.77,9.52) 12(-7.06,9.52)
  oval 1.3x2.8 hole 0.7 slot 2.2 at 90 deg mask+0.05: SH1(8.04,4.2) SH2(-8.04,4.2)
  Multi-Layer keep-out lines w0.1: 9,0 7,0 7,6.4 ccw(c7,7.3) 7,8.2 -7,8.2 ccw(c-7,7.3) -7,6.4 -7,0 -9,0
  silkscreen extent -8.23,-4.1 8.22,11.45, body extent -8.39,-4.1 8.39,11.9, height 6.85
CON_SAMTEC_SMA-J-P-X-ST-EM1 [mm]
  rect 1.27x3.6 smd mask+0.05: 1(0,1.9)
  rect 1.35x4.2 smd mask+0.05: 2(-2.825,2.1) 3(2.825,2.1)
  rect 1.35x4.2 smd far side mask+0.05: 4(2.825,2.1) 5(-2.825,2.1)
  silkscreen extent -3.62,0 3.62,4.33, body extent -3.17,-9.53 3.18,3.8, height 3.55
CON_SAMTEC_SQT-110-01-F-D-RA__STMOD+ [mm] "SQT-110-01-F-D-RA (connecteur SAMTEC pour interface STMod+ femelle coté Host) Pinning adapté non conforme SAMTEC."
  rect 1.7x1.7 hole 0.9 mask+0.05: 1(9,1)
  round 1.7 hole 0.9 mask+0.05: 2(7,1) 3(5,1) 4(3,1) 5(1,1) 6(-1,1) 7(-3,1) 8(-5,1) 9(-7,1) 10(-9,1) 11(9,-1) 12(7,-1) 13(5,-1) 14(3,-1) 15(1,-1) 16(-1,-1) 17(-3,-1) 18(-5,-1) 19(-7,-1) 20(-9,-1)
  silkscreen extent -10.15,-8.62 10.15,0.07, body extent -10.15,-8.65 10.15,1.22, height 4
CON_SAMTEC_SSW-106-02-F-D-RA__PMOD [mm] "SSW-106-02-F-D-RA (connecteur SAMTEC pour interface PMOD femelle coté Host) Pinning adapté non conforme SAMTEC."
  rect 1.9x1.9 hole 1.1 mask+0.05: 1(6.35,1.27)
  round 1.9 hole 1.1 mask+0.05: 2(3.81,1.27) 3(1.27,1.27) 4(-1.27,1.27) 5(-3.81,1.27) 6(-6.35,1.27) 7(6.35,-1.27) 8(3.81,-1.27) 9(1.27,-1.27) 10(-1.27,-1.27) 11(-3.81,-1.27) 12(-6.35,-1.27)
  silkscreen extent -7.88,-11.3 7.88,0.23, body extent -7.87,-11.31 7.87,1.47, height 5.21
CON_SAMTEC_SSW-106-22-X-S-VS [mil]
  rect 40x95 smd mask+1.97: 1(250,67.5) 2(150,-67.5) 3(50,67.5) 4(-50,-67.5) 5(-150,67.5) 6(-250,-67.5)
  silkscreen extent -310,-48 310,48, body extent -310,-101 310,102, height 385